# Altium PCB pcb.pcbdoc (part 1 of 3)
Units mm, origin at the board's own origin, x right, y up, seen from the top; angles counter-clockwise.
Board outline 95 x 60 mm, 4 copper layers (Top Layer, TopInt Layer, BotInt Layer, Bottom Layer), stack 1.456 mm thick; 192 components, 186 nets, 777 pads, 311 vias.
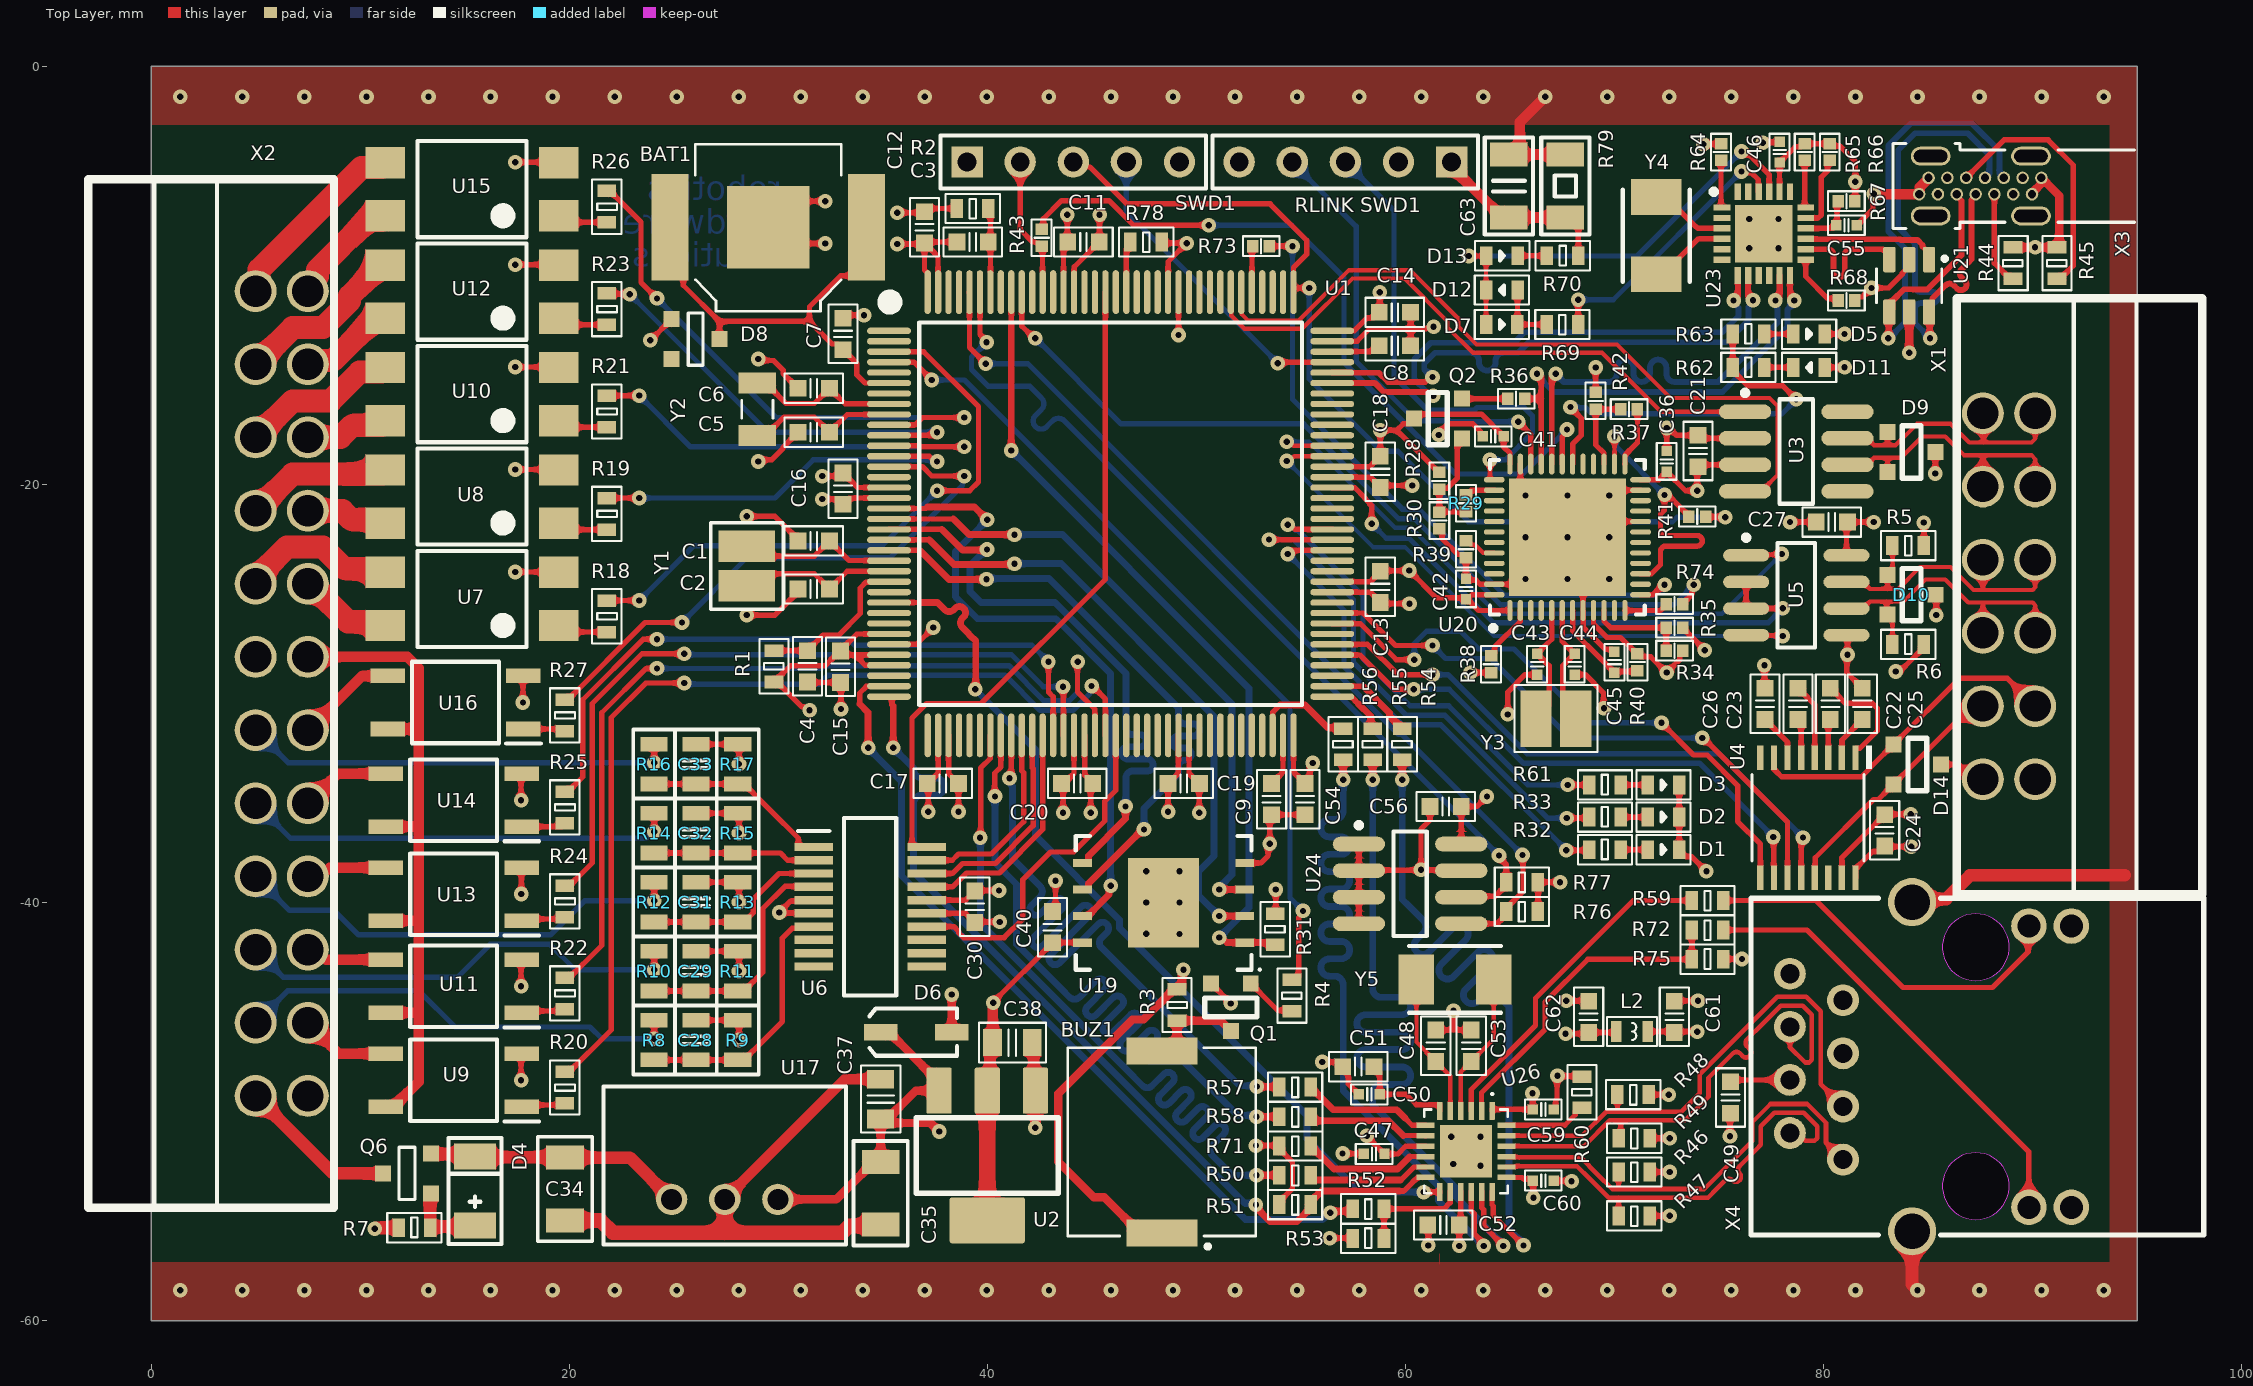
[diagram p0: Top Layer view]
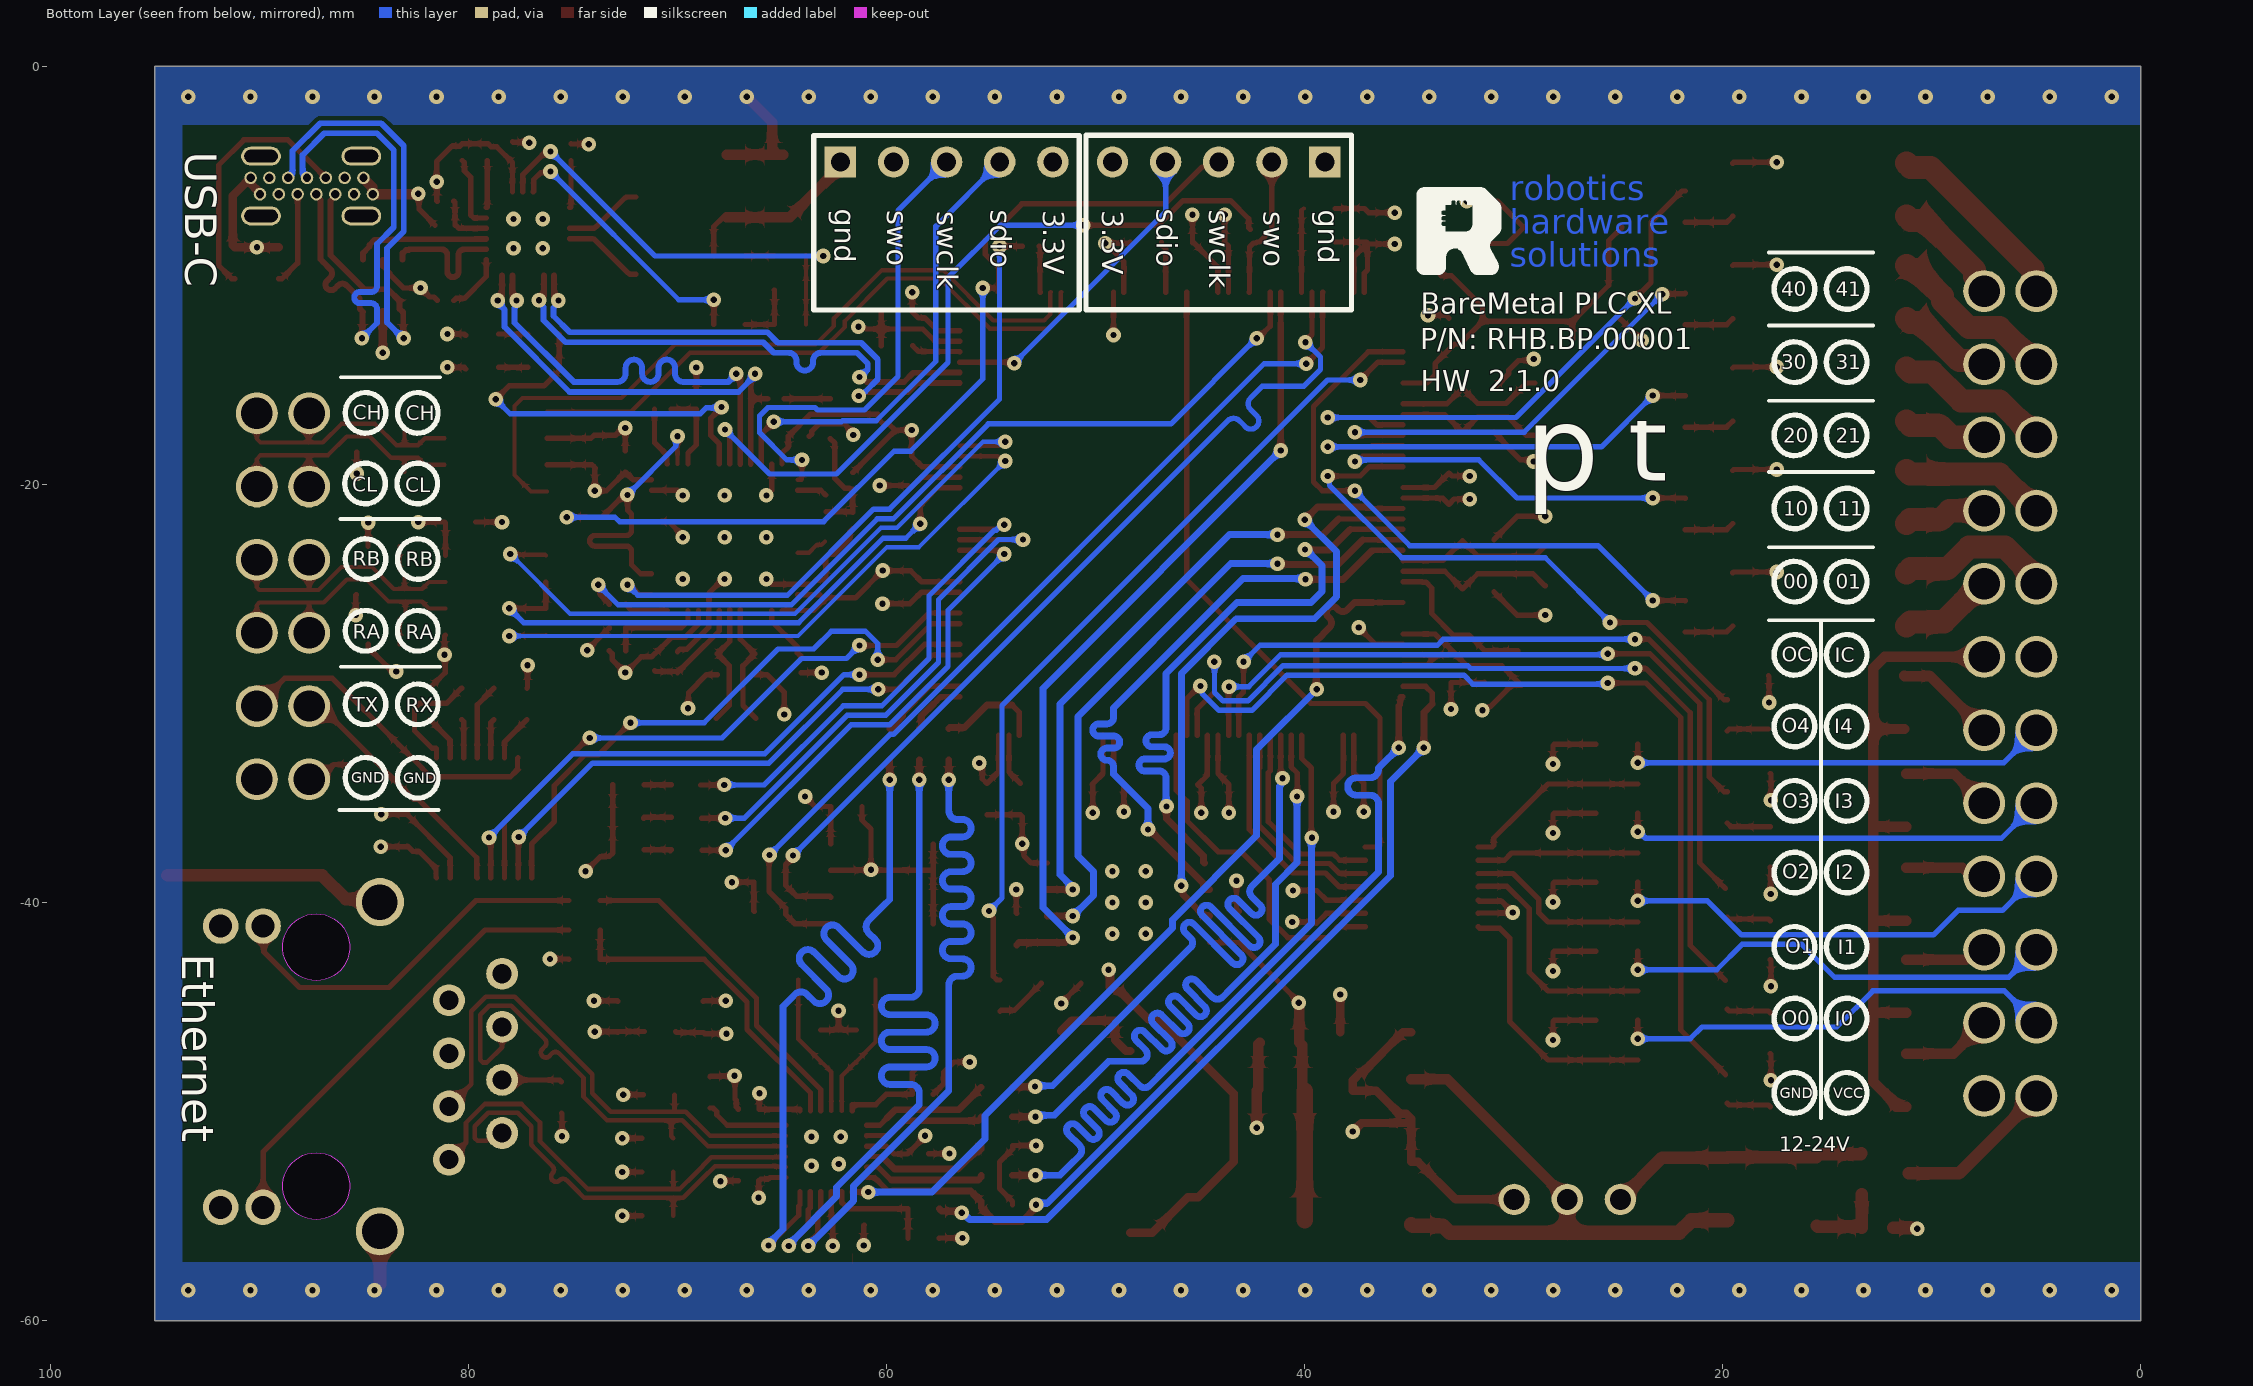
[diagram p1: Bottom Layer view, seen from below]
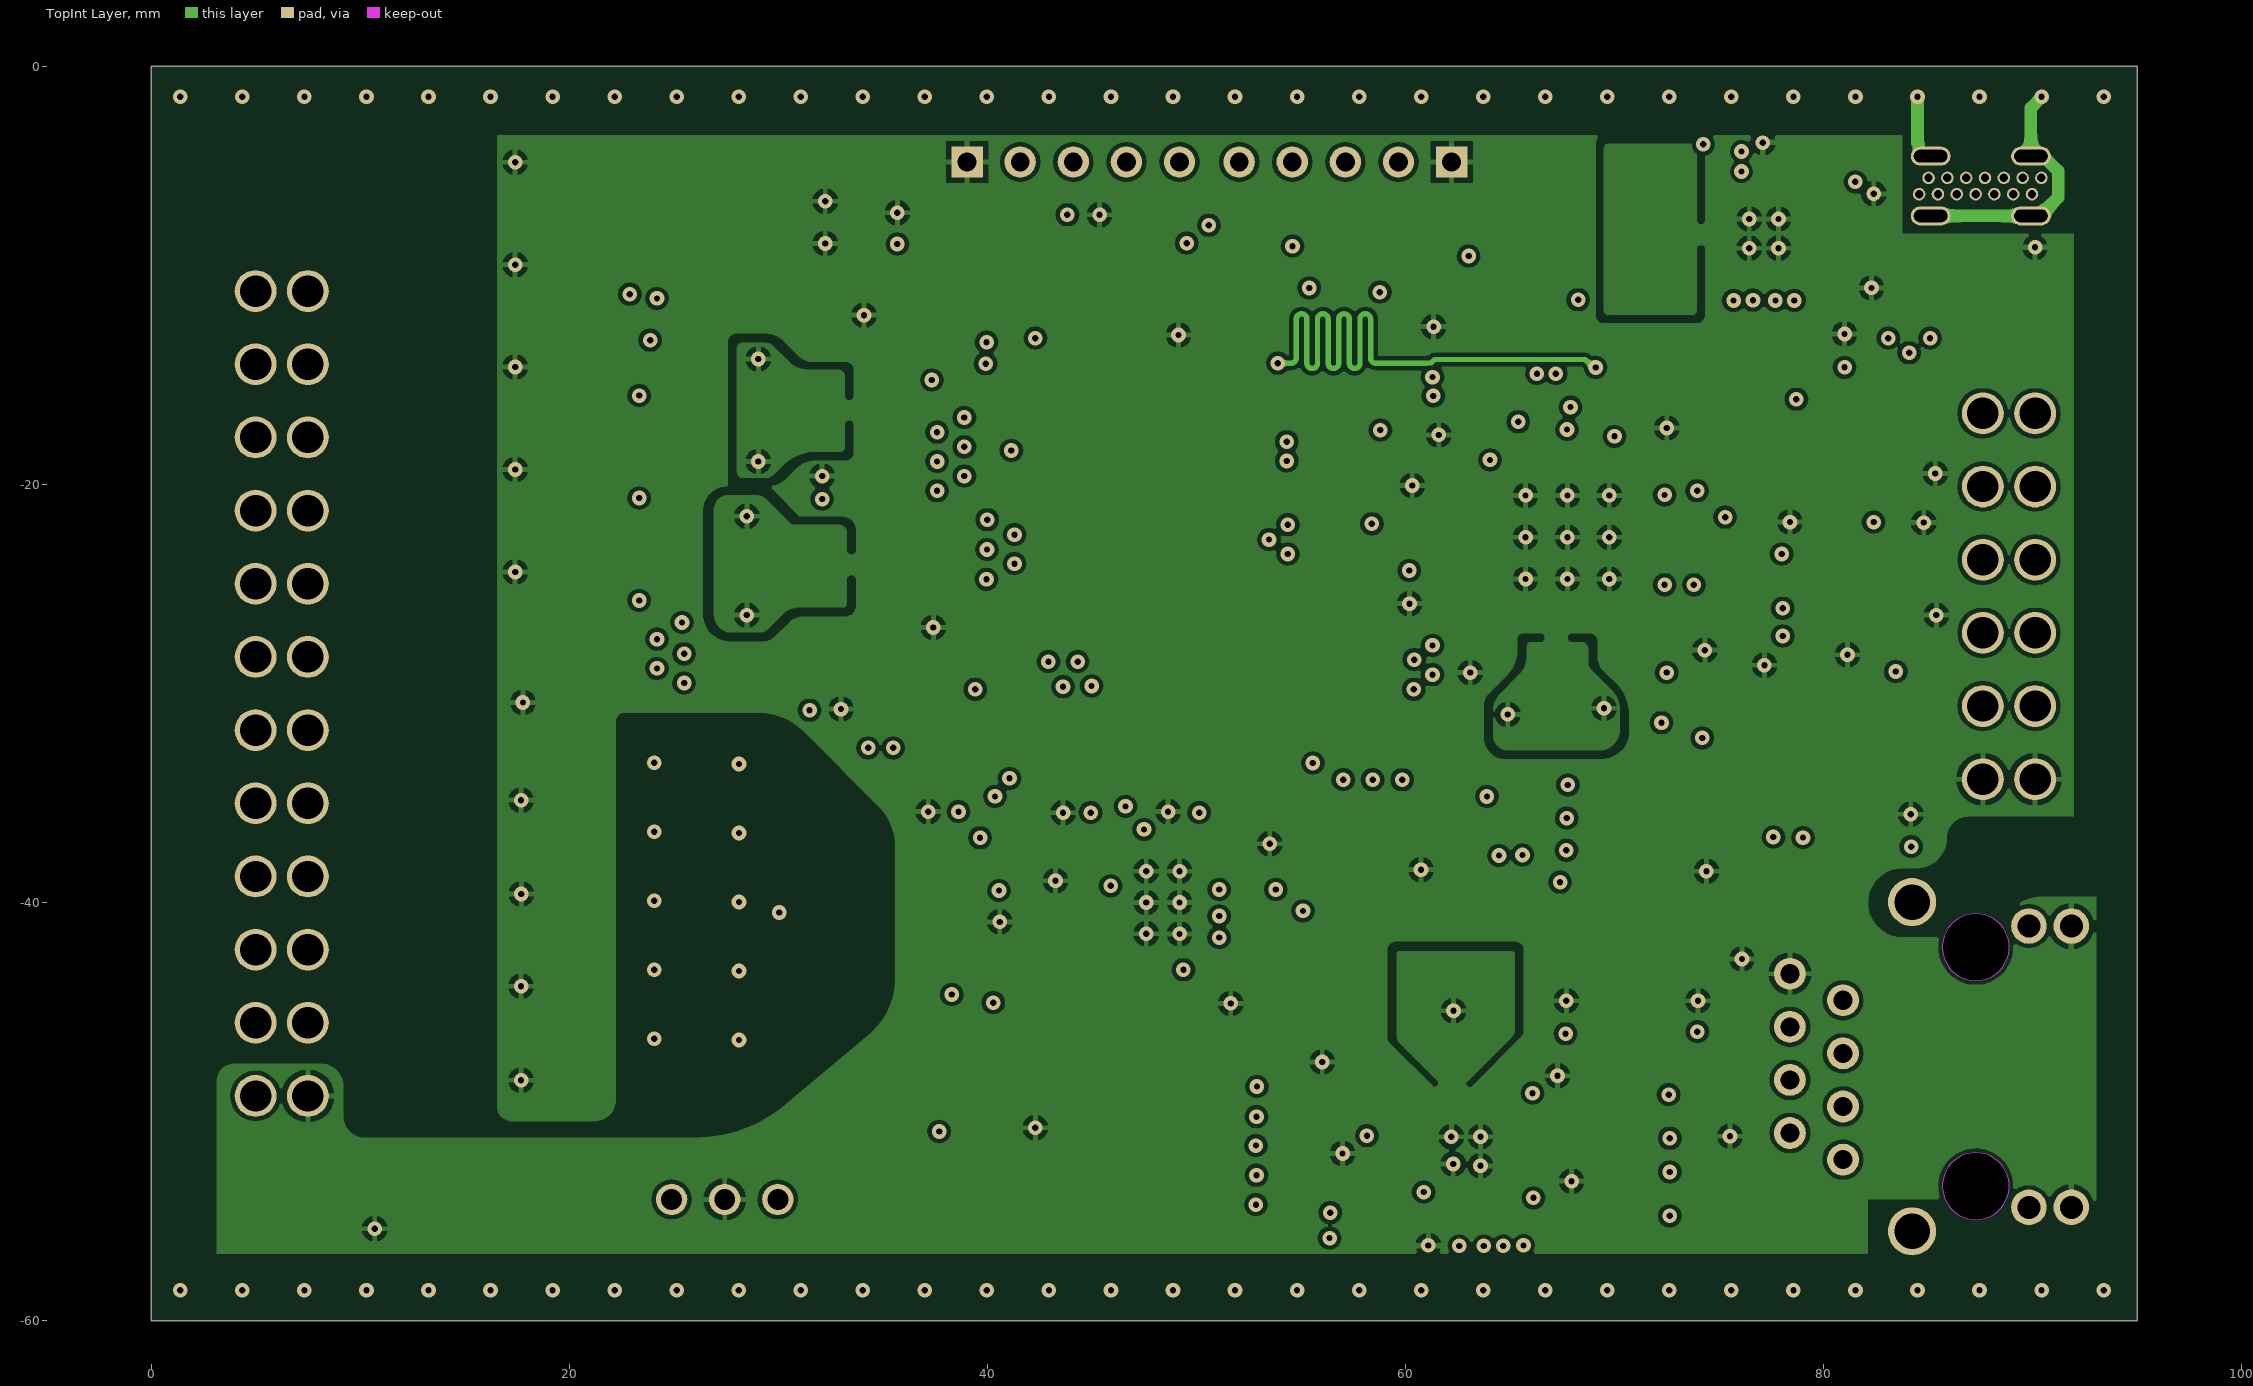
[diagram p2: TopInt Layer]
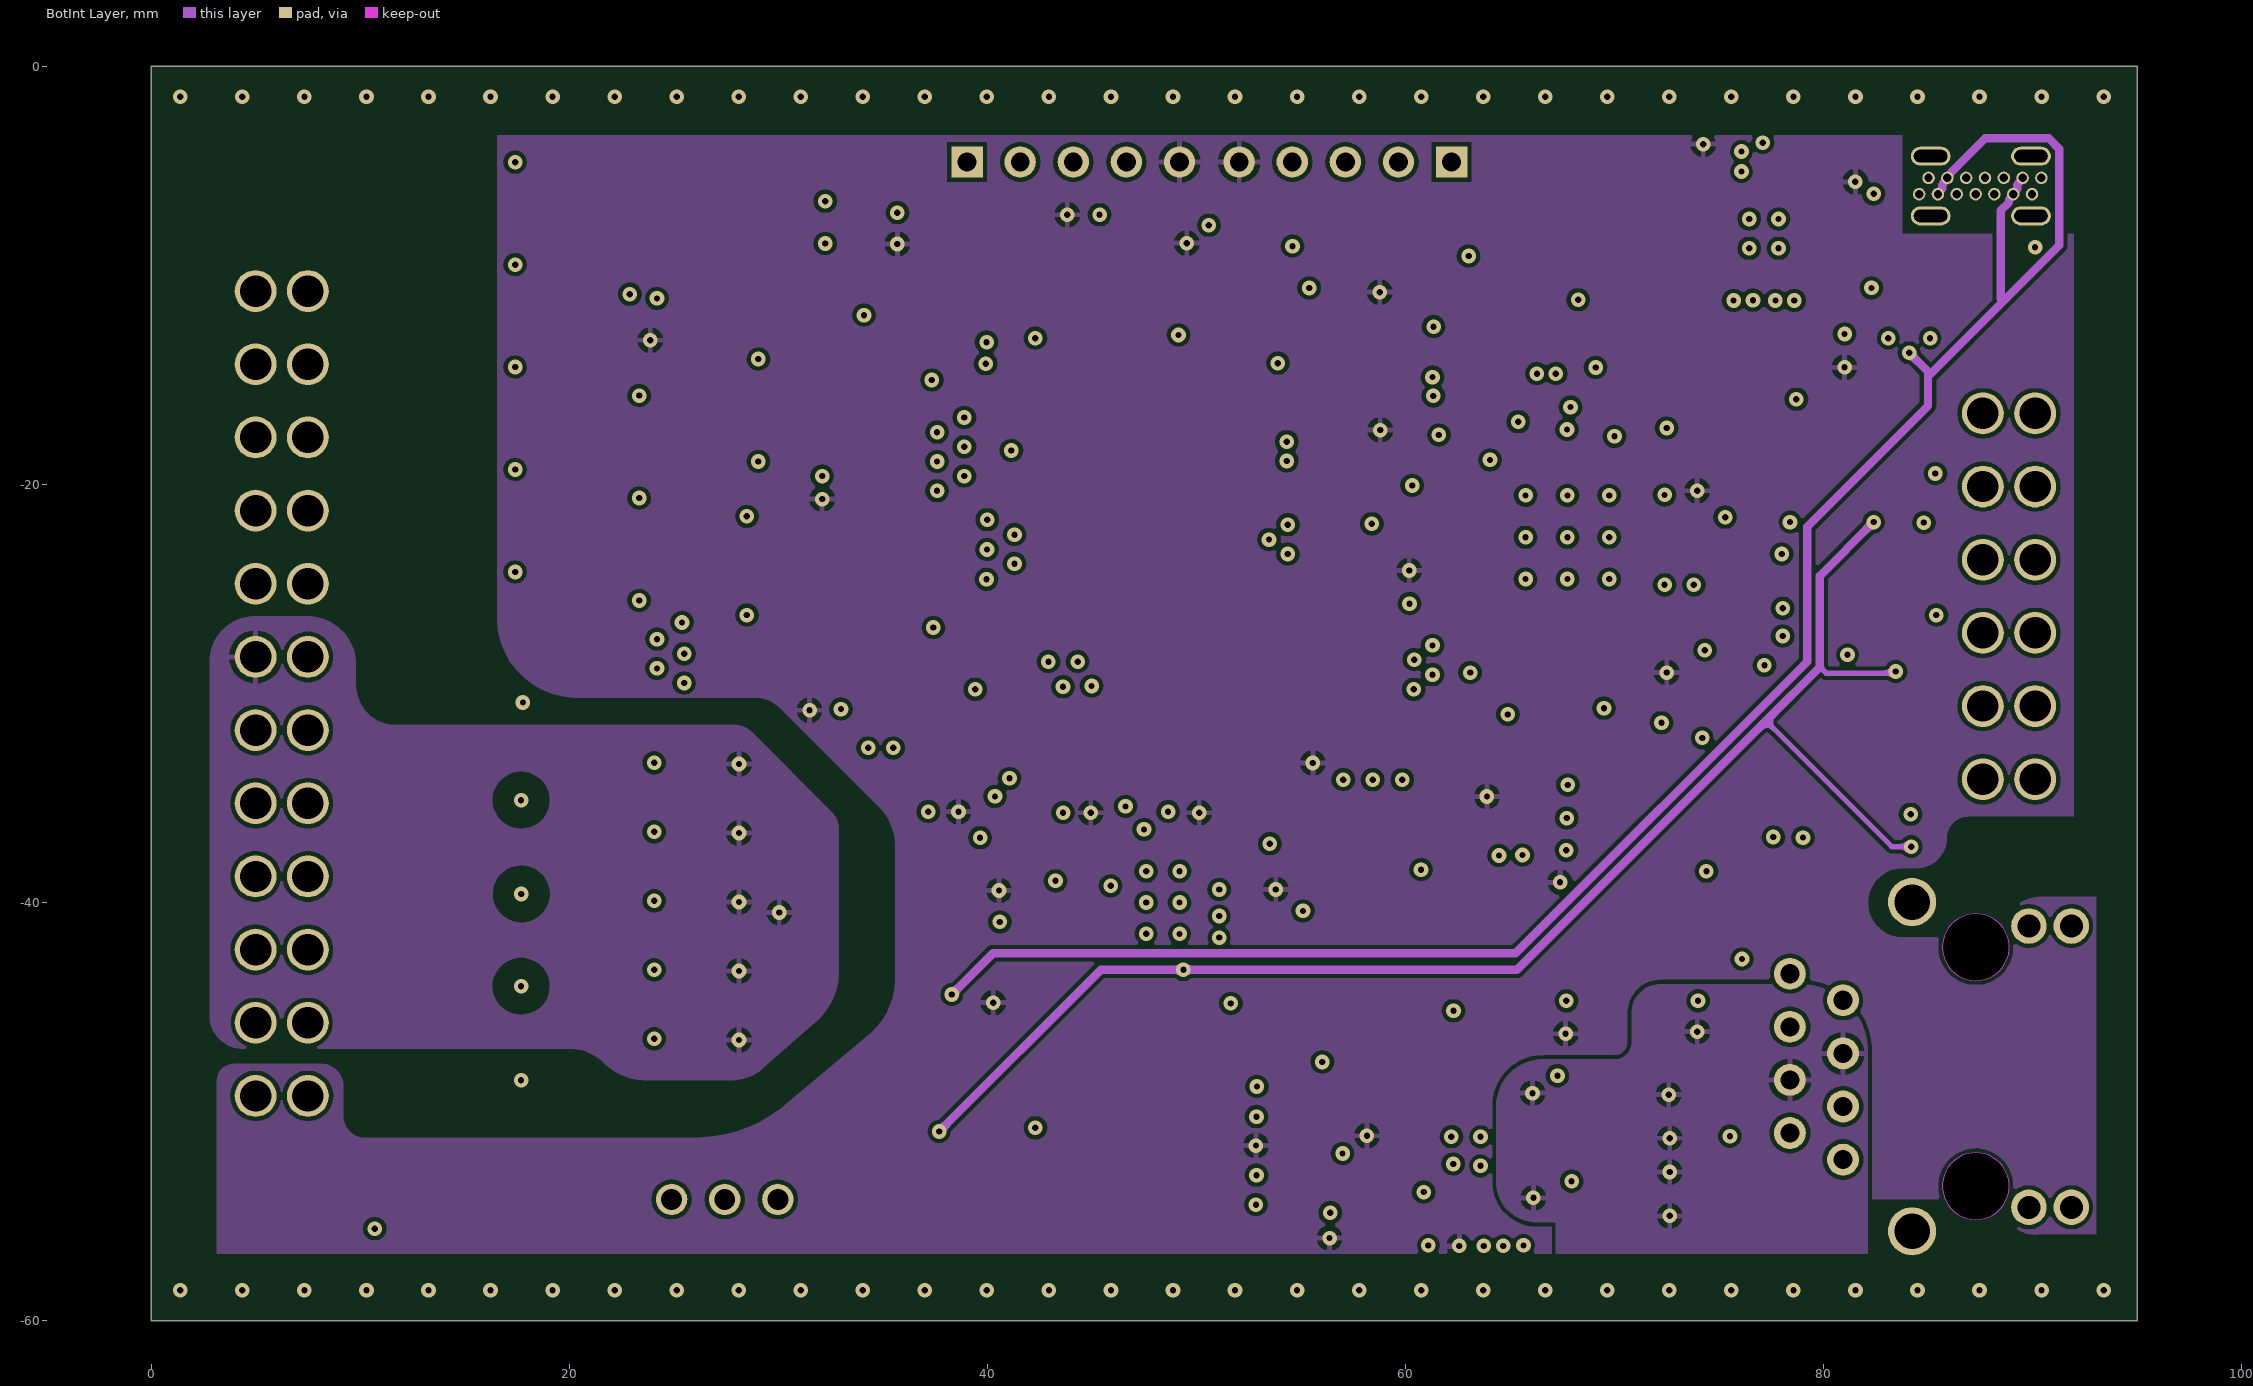
[diagram p3: BotInt Layer]

## Layer stack, top to bottom
Top Solder: solder mask 0.0102, Solder Resist, Dk 3.5
Top Layer: signal copper 0.035
Dielectric 4: prepreg 0.193, FR-4 (TG150), Dk 4.6
TopInt Layer: signal copper 0.035
Dielectric 3: core 0.93, FR-4 (TG150), Dk 4.6
BotInt Layer: signal copper 0.035
Dielectric 5: prepreg 0.193, FR-4 (TG150), Dk 4.6
Bottom Layer: signal copper 0.035
Bottom Solder: solder mask 0.0102, Solder Resist, Dk 3.5

## Board outline
0,-60 95,-60 95,0 0,0

## Design rules (kind name [scope] priority, off if disabled: settings)
Clearance [All] p1: gap=0.2 ignorepadtopadclearanceinfootprint=TRUE
DiffPairsRouting DiffPairsRoutingRS485 [InDifferentialPair('RS485')] p1: maxlimit=0.548 minlimit=0.254 mostfreqgap=0.548 toplayer_mingap=0.4 toplayer_maxgap=0.4 toplayer_prefgap=0.4 toplayer_minwidth=0.2 toplayer_maxwidth=0.2 toplayer_prefwidth=0.2 bottomlayer_mingap=0.4 bottomlayer_maxgap=0.4 bottomlayer_prefgap=0.4 bottomlayer_minwidth=0.2 bottomlayer_maxwidth=0.2 bottomlayer_prefwidth=0.2 impedanceprofiledriven=TRUE impedanceprofileid={0CD26A87-7467-4AA8-B589-CDAB2CE7D8B1} impedanceprofilevalue=120.000000 maxuncoupledlength=12.7
DiffPairsRouting DiffPairsRoutingCAN [InDifferentialPair('CAN')] p2: maxlimit=0.548 minlimit=0.127 mostfreqgap=0.548 toplayer_mingap=0.4 toplayer_maxgap=0.4 toplayer_prefgap=0.4 toplayer_minwidth=0.2 toplayer_maxwidth=0.2 toplayer_prefwidth=0.2 bottomlayer_mingap=0.4 bottomlayer_maxgap=0.4 bottomlayer_prefgap=0.4 bottomlayer_minwidth=0.2 bottomlayer_maxwidth=0.2 bottomlayer_prefwidth=0.2 impedanceprofiledriven=TRUE impedanceprofileid={A91272E8-C8F6-4C4C-99E7-20C5360C3B78} impedanceprofilevalue=120.000000 maxuncoupledlength=12.7
DiffPairsRouting DiffPairsRoutingRJ45 [InDifferentialPairClass('RJ45')] p3: maxlimit=0.254 minlimit=0.2 mostfreqgap=0.254 toplayer_maxgap=0.2 toplayer_prefgap=0.2 toplayer_minwidth=0.22 toplayer_maxwidth=0.22 toplayer_prefwidth=0.22 bottomlayer_maxgap=0.2 bottomlayer_prefgap=0.2 bottomlayer_minwidth=0.22 bottomlayer_maxwidth=0.22 bottomlayer_prefwidth=0.22 impedanceprofiledriven=TRUE impedanceprofileid={986FC914-A1FE-4ACC-8DF7-E6FD76750B9A} impedanceprofilevalue=100.000000 maxuncoupledlength=12.7
DiffPairsRouting DiffPairsRoutingUSB [InDifferentialPairClass('USB')] p4: maxlimit=0.254 minlimit=0.2 mostfreqgap=0.254 toplayer_maxgap=0.2 toplayer_prefgap=0.2 toplayer_minwidth=0.279 toplayer_maxwidth=0.279 toplayer_prefwidth=0.279 bottomlayer_maxgap=0.2 bottomlayer_prefgap=0.2 bottomlayer_minwidth=0.279 bottomlayer_maxwidth=0.279 bottomlayer_prefwidth=0.279 impedanceprofiledriven=TRUE impedanceprofileid={2354B49F-0040-4CFA-8CDB-5E1B61B2854D} impedanceprofilevalue=90.000000 maxuncoupledlength=12.7
HoleSize [All] p1: absolutevalues=TRUE maxlimit=4 minlimit=0.2 maxpercent=80.000 minpercent=20.000
MatchedLengths MatchedLengths_I2C_EEPROM [InNetClass('I2C_EEPROM')] p1: tolerance=0.2 checknetsindiffpair=FALSE checkdiffpairvsdiffpair=TRUE checkxsignals=TRUE checkothers=TRUE
MatchedLengths MatchedLengths_QSPI [InxSignalClass('QSPI')] p2: tolerance=0.2 checknetsindiffpair=FALSE checkdiffpairvsdiffpair=TRUE checkxsignals=TRUE checkothers=TRUE
MatchedLengths MatchedLengths_ETH_RJ45 [InDifferentialPairClass('RJ45')] p3: tolerance=0.2 checknetsindiffpair=TRUE checkdiffpairvsdiffpair=FALSE checkxsignals=FALSE checkothers=FALSE
MatchedLengths MatchedLengths_ETH [InxSignalClass('RMII')] p4: tolerance=0.2 checknetsindiffpair=FALSE checkdiffpairvsdiffpair=TRUE checkxsignals=TRUE checkothers=TRUE
MatchedLengths MatchedLengths_SWD [InxSignalClass('SWD')] p5: tolerance=0.2 checknetsindiffpair=FALSE checkdiffpairvsdiffpair=TRUE checkxsignals=TRUE checkothers=TRUE
MatchedLengths MatchedLengths_USB [InDifferentialPairClass('USB')] p6: tolerance=0.2 checknetsindiffpair=TRUE checkdiffpairvsdiffpair=FALSE checkxsignals=FALSE checkothers=FALSE
MatchedLengths MatchedLengths_RS485 [InNetClass('RS485')] p7: tolerance=0.25 checknetsindiffpair=FALSE checkdiffpairvsdiffpair=TRUE checkxsignals=TRUE checkothers=TRUE
MatchedLengths MatchedLengths_СAN [InNetClass('CAN')] p8: tolerance=0.25 checknetsindiffpair=TRUE checkdiffpairvsdiffpair=FALSE checkxsignals=FALSE checkothers=FALSE
MinimumSolderMaskSliver [All] p1: minsoldermaskwidth=0.1
NetAntennae [Not InNet('SHIELD') And IsNet] p1: netantennaetolerance=0
ParallelSegment ParallelSegment_SWD [InXSignalClass('SWD')] p1: limit=25.4 gap=0.508
ParallelSegment ParallelSegment_RMII [InXSignalClass('RMII')] p2: limit=25.4 gap=0.508
ParallelSegment ParallelSegment_QSPI [InXSignalClass('QSPI') vs InXSignalClass('QSPI')] p3: limit=25.4 gap=0.508
PolygonConnect PolygonConnect_1 [InNet('SHIELD')] p1: connectstyle=Direct reliefconductorwidth=0.254 reliefentries=4 polygonreliefangle="90 Angle" airgapwidth=0.254
PolygonConnect [All] p2: connectstyle=Relief reliefconductorwidth=0.254 reliefentries=4 polygonreliefangle="90 Angle" airgapwidth=0.254
RoutingVias [All] p1: holewidth=0.3 width=0.7 viastyle="Through Hole" minholewidth=0.3 minwidth=0.7 maxholewidth=0.3 maxwidth=0.7
SilkToSilkClearance [All] p1: silktosilkclearance=0
SilkToSolderMaskClearance [IsPad] p1: minsilkscreentomaskgap=0.01 clearancetoexposedcopper=TRUE
SolderMaskExpansion SolderMaskExpansion_Via [IsVia] p1: expansion=0.05 istentingtop=TRUE useseparateexpansions=TRUE expansionbottom=0.05 istentingbottom=TRUE
SolderMaskExpansion [All] p2: expansion=0.05 istentingtop=FALSE useseparateexpansions=TRUE expansionbottom=0.05 istentingbottom=FALSE
UnRoutedNet UnRoutedNet_RegionLogo [OnLayer('Bottom Layer') && IsRegion] p1 off:
UnRoutedNet [All] p2: checkbadconnections=TRUE
Width Width_UART [InNetClass('UART')] p1: maxlimit=0.325 minlimit=0.254 preferedwidth=0.325 impedanceprofiledriven=TRUE impedanceprofileid={2350BD46-1102-4CA0-B769-CF567CDB831D} impedanceprofilevalue=50.000000 minimp=50.000000 maximp=50.000000 favimp=50.000000
Width Width_SWD [InNetClass('SWD')] p2: maxlimit=0.325 minlimit=0.254 preferedwidth=0.325 impedanceprofiledriven=TRUE impedanceprofileid={11ABE65C-2ECF-4417-B09D-992BCD4A5570} impedanceprofilevalue=50.000000 minimp=50.000000 maximp=50.000000 favimp=50.000000
Width Width_QSPI [InNetClass('QSPI')] p3: maxlimit=0.325 minlimit=0.254 preferedwidth=0.325 impedanceprofiledriven=TRUE impedanceprofileid={12ACEEA3-3501-4A91-BA66-AB418826FC36} impedanceprofilevalue=50.000000 minimp=50.000000 maximp=50.000000 favimp=50.000000
Width Width_eth [InNetClass('ETH')] p4: maxlimit=0.325 minlimit=0.254 preferedwidth=0.325 impedanceprofiledriven=TRUE impedanceprofileid={FBDE6998-475E-412D-8F43-3A9D25EF8CF1} impedanceprofilevalue=50.000000 minimp=50.000000 maximp=50.000000 favimp=50.000000 checkconnectedcopper=TRUE
Width [All] p5: maxlimit=25 minlimit=0.2 preferedwidth=0.254 midlayer1_maxwidth=5 midlayer2_maxwidth=5 minimp=50.000000 maximp=50.000000 favimp=50.000000
23 further rules are at their usual default settings.

## Classes and differential pairs
net class UART: NetR73_1 NetR74_2
net class SWD: SWCLK1 SWDIO1 SWO1
net class I2C_EEPROM: NetR76_1 NetR77_1
differential pair class RS485: RS485
net class RS485: RS485_N RS485_P
differential pair class USB: USB_CONN_D USB_HUB USB_MCU USB_RLINK
net class CAN: CAN_N CAN_P
net class USB_RLINK: USB_RLINK_N USB_RLINK_P
net class USB_MCU: USB_MCU_N USB_MCU_P
net class USB_HUB: USB_HUB_N USB_HUB_P
net class USB_C: USB_CONN_D_N USB_CONN_D_P
component class eeprom: C56 R76 R77
differential pair class RJ45: RD TD
net class ETH_RJ45: RD_N RD_P TD_N TD_P
net class ETH: ENET_CRS ENET_MDC ENET_MDIO ENET_REF_CLK ENET_RXD0 ENET_RXD1 ENET_TX_EN ENET_TXD0 ENET_TXD1
component class eth: C47 C48 C49 C50 C51 C52 C53 C59 C60 C61 C62 L2 R46 R47 R48 R49 R50 R51 R52 R53 R54 R55 R56 R57 R58 R59 R60 R71 R72 R75 U26 X4 Y5
component class usb: "    " C46 C55 C63 D7 D12 D13 R44 R45 R64 R65 R66 R67 R68 R69 R70 R79 U21 U23 X3
component class dcdc: C34 C35 C37 C38 D6 U2 U17
component class MCU: BAT1 BUZ1 C1 C2 C3 C4 C5 C6 C7 C8 C9 C11 C12 C13 C14 C15 C16 C17 C18 C19 C20 C54 D1 D2 D3 D8 Q1 R1 R2 R3 R4 R32 R33 R61 R78 U1 Y1 Y2
component class interfaces: C21 C22 C23 C24 C25 C26 C27 D9 D10 D14 R5 R6 U3 U4 U5 X1
component class connections: C28 C29 C30 C31 C32 C33 D4 Q6 R7 R8 R9 R10 R11 R12 R13 R14 R15 R16 R17 R18 R19 R20 R21 R22 R23 R24 R25 R26 R27 U6 U7 U8 U9 U10 U11 U12 U13 U14 U15 U16 X2
component class qspi_flash: C40 R31 U19
component class rlink_eth: C36 C41 C42 C43 C44 C45 D5 D11 Q2 R28 R29 R30 R34 R35 R36 R37 R38 R39 R40 R41 R42 R43 R62 R63 R73 R74 "RLINK SWD1" SWD1 U20 Y3
net class QSPI: QUADSPI_CLK QUADSPI_NCS QUADSPI_OI0 QUADSPI_OI1 QUADSPI_OI2 QUADSPI_OI3
differential pair CAN: +CAN_P -CAN_N
differential pair USB_HUB: +USB_HUB_P -USB_HUB_N
differential pair USB_RLINK: +USB_RLINK_P -USB_RLINK_N
differential pair USB_MCU: +USB_MCU_P -USB_MCU_N
differential pair TD: +TD_P -TD_N
differential pair RD: +RD_P -RD_N
differential pair USB_CONN_D: +USB_CONN_D_P -USB_CONN_D_N
differential pair RS485: +RS485_P -RS485_N

## Components (designator, comment, footprint, x,y, rotation, side; value= is the part's Value field where it differs from the comment)
BAT1 "2998TR" BAT_2998TR 29.525,-7.7 r180 top locked
BUZ1 "L-KLS3-SMT-09X1.8'" SPKR_PKMCS0909E4000-R1 48.35,-51.45 r90 top locked
C1 "8pF 50V" C_0603 31.7,-22.7 r0 top
C2 "8pF 50V" C_0603 31.7,-25 r0 top
C3 "0.1uF 50V" C_0603 39.3,-8.4 r0 top
C4 "0.1uF 50V" C_0603 31.4,-28.7 r90 top
C5 "8pF 50V" C_0603 31.7,-17.5 r0 top
C6 "8pF 50V" C_0603 31.7,-15.4 r0 top
C7 "0.1uF 50V" C_0603 33.1,-12.8 r270 top
C8 "2.2uF 16V" C_0603 59.5,-13.368 r180 top
C9 "2.2uF 16V" C_0603 53.6,-35.052 r90 top
C11 "0.1uF 50V" C_0603 44.6,-8.4 r180 top
C12 "0.1uF 50V" C_0603 37,-7.7 r270 top
C13 "0.1uF 50V" C_0603 58.8,-24.9 r90 top
C14 "0.1uF 50V" C_0603 59.5,-11.768 r180 top
C15 "0.1uF 50V" C_0603 32.98,-28.72 r90 top
C16 "0.1uF 50V" C_0603 33.1,-20.2 r270 top
C17 "0.1uF 50V" C_0603 37.873,-34.3 r0 top
C18 "0.1uF 50V" C_0603 58.8,-19.4 r90 top
C19 "0.1uF 50V" C_0603 49.4,-34.3 r0 top
C20 "0.1uF 50V" C_0603 44.3,-34.3 r0 top
C21 "0.1uF 50V" C_0603 74,-18.4 r270 top
C22 "0.1uF 50V" C_0603 80.33,-30.494 r270 top
C23 "0.1uF 50V" C_0603 78.78,-30.494 r270 top
C24 "0.1uF 50V" C_0603 82.925,-36.548 r270 top
C25 "0.1uF 50V" C_0603 81.855,-30.494 r270 top
C26 "0.1uF 50V" C_0603 77.205,-30.494 r270 top
C27 "0.1uF 50V" C_0603 80.4,-21.8 r0 top locked
C28 "2.2nF 50V" C_0805#1 26.065,-46.578 r270 top
C29 "2.2nF 50V" C_0805#1 26.065,-43.278 r270 top
C30 "0.1uF 50V" C_0603 39.4,-40.2 r90 top
C31 "2.2nF 50V" C_0805#1 26.065,-39.978 r270 top
C32 "2.2nF 50V" C_0805#1 26.065,-36.678 r270 top
C33 "2.2nF 50V" C_0805#1 26.065,-33.378 r270 top
C34 "10uF 50V" C_1206 19.8,-53.7 r270 top
C35 "22uF 25V" C_1206 34.9,-53.9 r90 top
C36 "100nF 16V" C_0402 72.5,-18.9 r270 top
C37 "10uF 10V" C_0805#2 34.9,-49.4 r270 top
C38 "10uF 10V" C_0805#2 41.2,-46.7 r180 top
C40 "0.1uF 50V" C_0603 43.117,-41.177 r270 top
C41 "100nF 16V" C_0402 64.2,-17.7 r0 top
C42 "100nF 16V" C_0402 62.9,-25 r270 top
C43 "8pF 50V" C_0402 66.3,-28.6 r90 top
C44 "8pF 50V" C_0402 68.1,-28.6 r90 top
C45 "100nF 16V" C_0402 70,-28.5 r270 top
C46 "100nF 16V" C_0402 77.9,-4.1 r270 top
C47 "0.01uF 50V" C_0402 58.5,-52.025 r180 top
C48 "30pF 50V" C_0603 61.45,-46.85 r90 top
C49 "0.022uF" C_0603 75.55,-49.325 r90 top
C50 "470pF 50V" C_0402 58.275,-49.175 r180 top
C51 "1uF 50V" C_0603 57.75,-47.85 r0 top
C52 "1uF 50V" C_0603 61.82,-55.425 r0 top
C53 "30pF 50V" C_0603 63.15,-46.85 r90 top
C54 "0.1uF 50V" C_0603 55.2,-35.052 r90 top
C55 "100nF 16V" C_0402 81.1,-7.6 r0 top
C56 "0.1uF 50V" C_0603 61.925,-35.406 r0 top
C59 "0.01uF 50V" C_0402 66.6,-49.9 r0 top
C60 "0.01uF 50V" C_0402 66.6,-53.3 r0 top
C61 "1uF 50V" C_0603 72.867,-45.465 r270 top
C62 "1uF 50V" C_0603 68.767,-45.465 r270 top
C63 "1nF 1000V" C_1206 64.95,-5.725 r90 top
D1 "Green" LED_0603 72.348,-37.47 r0 top
D2 "Yellow" LED_0603 72.348,-35.913 r0 top
D3 "Red" LED_0603 72.348,-34.37 r0 top
D4 "BZV55C10" SOD80C 15.5,-53.8 r270 top
D5 "Red" LED_0603 79.31,-12.8 r0 top
D6 "SM5819PL-TP" SOD-123 36.6,-46.2 r180 top
D7 "Green" LED_0603 64.61,-12.35 r0 top
D8 "BAT54" SOT23#1 24.9,-12.095 r180 top
D9 "ESDCAN24-2BLY" SOT23#2 83.064,-17.498 r0 top
D10 "SM712-02HTG" SOT23#2 83.064,-24.322 r0 top
D11 "Green" LED_0603 79.31,-14.4 r180 top
D12 "Yellow" LED_0603 64.62,-10.7 r180 top
D13 "Red" LED_0603 64.623,-9.063 r0 top
D14 "ESD25L" SOT23#2 83.339,-32.447 r0 top
L2 "1uH" L_0603 70.842,-46.165 r0 top
Q1 "BC847B" SOT23#2 52.603,-43.864 r270 top
Q2 "MMBT9013" SOT23#2 62.7,-17.8 r180 top
Q6 "SI2309A" SOT23#1 13.384,-53.907 r0 top
R1 "10k" R_0603 29.8,-28.7 r270 top
R2 "10K" R_0603 39.3,-6.8 r0 top value=10k
R3 "1K" R_0603 49.075,-44.9 r90 top value=1k
R4 "3.3K" R_0603 54.575,-44.45 r270 top value=3.3k
R5 "10k" R_0603 84.05,-22.925 r0 top
R6 "10k" R_0603 84.05,-27.65 r180 top
R7 "100K" R_0603 12.598,-55.555 r180 top value=100k
R8 "6.2k" R_0805 24.065,-46.578 r270 top
R9 "2.4k" R_0805 28.065,-46.578 r270 top
R10 "6.2k" R_0805 24.065,-43.278 r270 top
R11 "2.4k" R_0805 28.065,-43.278 r270 top
R12 "6.2k" R_0805 24.065,-39.978 r270 top
R13 "2.4k" R_0805 28.065,-39.978 r270 top
R14 "6.2k" R_0805 24.065,-36.678 r270 top
R15 "2.4k" R_0805 28.065,-36.678 r270 top
R16 "6.2k" R_0805 24.065,-33.378 r270 top
R17 "2.4k" R_0805 28.065,-33.378 r270 top
R18 "300" R_0603 21.8,-26.31 r90 top
R19 "300" R_0603 21.8,-21.41 r90 top
R20 "300" R_0603 19.787,-48.848 r90 top
R21 "300" R_0603 21.8,-16.51 r90 top
R22 "300" R_0603 19.787,-44.348 r90 top
R23 "300" R_0603 21.8,-11.61 r90 top
R24 "300" R_0603 19.787,-39.948 r90 top
R25 "300" R_0603 19.787,-35.448 r90 top
R26 "300" R_0603 21.8,-6.71 r90 top
R27 "300" R_0603 19.787,-31.048 r90 top
R28 "10K" R_0402 61.625,-19.825 r90 top
R29 "100" R_0402 62.9,-20.9 r270 top
R30 "36K" R_0402 61.625,-21.725 r270 top
R31 "10K" R_0603 53.774,-41.277 r270 top value=10k
R32 "300" R_0603 69.548,-37.47 r180 top
R33 "300" R_0603 69.548,-35.913 r180 top
R34 "4.7K" R_0402 72.875,-27.95 r0 top
R35 "4.7K" R_0402 72.875,-26.85 r0 top
R36 "1.5K" R_0402 65.3,-15.9 r180 top
R37 "100" R_0402 70.7,-16.4 r180 top
R38 "4.7K" R_0402 64.1,-28.6 r270 top
R39 "100K" R_0402 62.9,-23.1 r90 top
R40 "100K" R_0402 71.1,-28.5 r90 top
R41 "22" R_0402 73.964,-21.536 r0 top
R42 "22" R_0402 69.1,-16 r90 top
R43 "22" R_0402 42.6,-8.2 r270 top
R44 "5.1k" R_0603 89.071,-9.409 r270 top
R45 "5.1k" R_0603 91.171,-9.409 r270 top
R46 "49.9" R_0603 70.948,-52.887 r0 top
R47 "49.9" R_0603 70.948,-54.987 r0 top
R48 "49.9" R_0603 70.895,-49.187 r0 top
R49 "49.9" R_0603 70.948,-51.275 r0 top
R50 "10" R_0603 54.727,-53.042 r0 top
R51 "4.7k" R_0603 54.725,-54.45 r0 top
R52 "33" R_0603 58.227,-54.65 r0 top
R53 "10k" R_0603 58.227,-56.063 r180 top
R54 "27" R_0603 59.847,-32.427 r270 top
R55 "27" R_0603 58.435,-32.427 r270 top
R56 "27" R_0603 57.025,-32.425 r270 top
R57 "10" R_0603 54.723,-48.83 r0 top
R58 "10" R_0603 54.727,-50.242 r0 top
R59 "330" R_0603 74.452,-39.9 r0 top
R60 "12.1k" R_0603 68.447,-49.075 r270 top
R61 "300" R_0603 69.548,-34.37 r180 top
R62 "300" R_0603 76.41,-14.4 r180 top
R63 "300" R_0603 76.41,-12.8 r180 top
R64 "10K" R_0402 75.1,-4.1 r90 top
R65 "10K" R_0402 79.1,-4.1 r90 top
R66 "10K" R_0402 80.3,-4.1 r90 top
R67 "10K" R_0402 81.1,-6.45 r0 top
R68 "2.7K" R_0402 81.1,-11.2 r0 top
R69 "300" R_0603 67.51,-12.35 r0 top
R70 "300" R_0603 67.523,-9.063 r180 top
R71 "4.7k" R_0603 54.727,-51.642 r0 top
R72 "330" R_0603 74.452,-41.313 r0 top
R73 "22" R_0402 53.1,-8.6 r180 top
R74 "22" R_0402 72.875,-25.725 r0 top
R75 "10k" R_0603 74.452,-42.713 r180 top
R76 "4.7k" R_0603 65.575,-40.425 r0 top
R77 "4.7k" R_0603 65.575,-39.025 r0 top
R78 "10K" R_0603 47.6,-8.4 r0 top value=10k
R79 "1M" R_1206 67.65,-5.725 r90 top
"RLINK SWD1" "PLS2-5" PLS-5-3D 62.21,-4.575 r180 top locked net-tie
SWD1 "PLS2-5" PLS-5-3D 39.035,-4.575 r0 top locked net-tie
U1 "STM32F765ZGT7" TQFP144_M 45.9,-21.4 r0 top locked
U2 "LM1117GS-3.3" "SOT 223" 40,-52.1 r90 top
U3 "SN65HVD232D" SO-8_M 78.7,-18.425 r0 top
U4 "ST232CTR" TSSOP16_STM 79.255,-35.943 r270 top
U5 "SN75176BDR" SO-8 78.7,-25.3 r0 top
U6 "CA-IS3988P" SOP64P600X175-20N 34.4,-40.2 r0 top
U7 "GAQY252G3EH" SMD-4P 19.502,-26.747 r90 top
U8 "GAQY252G3EH" SMD-4P 19.502,-21.847 r90 top
U9 "GAQY221R2S" SOP254P700X270-4N 17.725,-49.77 r90 top
U10 "GAQY252G3EH" SMD-4P 19.502,-16.947 r90 top
U11 "GAQY221R2S" SOP254P700X270-4N 17.725,-45.27 r90 top
U12 "GAQY252G3EH" SMD-4P 19.502,-12.047 r90 top
U13 "GAQY221R2S" SOP254P700X270-4N 17.725,-40.87 r90 top
U14 "GAQY221R2S" SOP254P700X270-4N 17.725,-36.37 r90 top
U15 "GAQY252G3EH" SMD-4P 19.502,-7.147 r90 top
U16 "GAQY221R2S" SOP254P700X270-4N 17.812,-31.698 r90 top
U17 "K7805-500R3" K7805500R3 24.9,-54.2 r180 top
U19 "W25Q128JVEIQ" "W-PDFN-8 (MLP8) – 8mm ? 6mm  Se" 48.448,-39.96 r90 top
U20 "STM32F103CBU6" STM-UFQFPN48_M 67.75,-22.525 r90 top
U21 "USBLC6-2SC6" SOT95P280X145-6N 84.1,-10.5 r270 top
U23 "FE1.1S-BQFN24B" QFN50P400X400X80-25N-D 77.15,-8 r0 top
U24 "24c256" SO-8_M 60.225,-39.106 r0 top
U26 "LAN8720A-CP-TR" QFN50P400X400X100-25N 62.895,-51.9 r270 top
X1 "1787056" "DMC 1.5/ 6-G1F-3.5-LR P20THR 1787056" 86.475,-25.35 r270 top locked
X2 "1787111" "DMC 1,5/12-G1F-3,5-LRP20THRR72" 8.65,-40.5 r90 top locked
X3 "KUSBX-SL-CS1N14-B" MOLEX_2169890001 95.025,-5.725 r90 top locked
X4 "HR915340A'" RJ45-TH_HR915340A 80.935,-52.295 r270 top locked
Y1 "NX3225GD" NX3225GD#1 28.5,-23.9 r270 top
Y2 "NX3215SA-32.768K-STD-MUA-14" XTAL_NX3215SA-32.768K-STD-MUA-8 29,-16.4 r90 top
Y3 "NX3225GD" NX3225GD#2 67.2,-31.2 r90 top
Y4 "X503212MSB2GI" X5032 72,-8.1 r270 top
Y5 "X503225MSB2GI" X5032 62.375,-43.675 r0 top

## Footprints (in the part's own frame and the unit in brackets; to place one, negate y for a bottom-side part, rotate by r counter-clockwise, add the part's x,y. Pads: shape width x height; smd on the part's side, far side on the other; paste and mask are expansions set on the pad)
BAT_2998TR [mm]
  rect 3.96x3.96 smd paste-3: N(0,0)
  rect 1.78x5.08 smd: P1(-4.7,0) P1(4.7,0)
  silkscreen extent -3.49,-3.98 3.49,4.02, body extent -5.36,-3.94 5.36,4.06, height 3.05
C_0402 [mm]
  rect 0.5x0.5 smd: 1(-0.5,0) 2(0.5,0)
  silkscreen extent -0.87,-0.48 0.87,0.48, body extent -0.5,-0.25 0.5,0.25, height 0.5
C_0603 [mm] "Chip Capacitor; Body 1.6 x 0.8 mm (LxW typ)"
  rect 0.8x0.8 smd: 1(-0.75,0) 2(0.75,0)
  silkscreen extent -1.4,-0.7 1.4,0.7, body extent -0.8,-0.4 0.8,0.4, height 0.3
C_0805#1 [mm] "Capacitor Pattern"
  rect 0.7x1.3 smd: 1(-0.95,0) 2(0.95,0)
  silkscreen extent -1.65,-1 1.65,1, body extent -1,-0.63 1,0.62, height 0.6
C_0805#2 [mm] "Capacitor Pattern"
  rect 0.9x1.3 smd: 1(-0.95,0) 2(0.95,0)
  silkscreen extent -1.6,-0.95 1.6,0.95, body extent -1,-0.63 1,0.62, height 0.6
C_1206 [mm]
  rect 1.15x1.8 smd: 1(-1.5,0) 2(1.5,0)
  silkscreen extent -2.5,-1.3 2.5,1.3, body extent -1.6,-0.8 1.6,0.8, height 1
"DMC 1,5/12-G1F-3,5-LRP20THRR72" [mm] "Connector LR"
  round 2 hole 1.5: 1(-8.75,3.65) 2(-5.25,3.65) 3(-1.75,3.65) 4(1.75,3.65) 5(5.25,3.65) 6(8.75,3.65) 7(12.25,3.65) 8(15.75,3.65) 9(19.25,3.65) 10(22.75,3.65) 11(26.25,3.65) 12(29.75,3.65) 13(29.75,1.15) 14(26.25,1.15) 15(22.75,1.15) 16(19.25,1.15) 17(15.75,1.15) 18(12.25,1.15) 19(8.75,1.15) 20(5.25,1.15) 21(1.75,1.15) 22(-1.75,1.15) 23(-5.25,1.15) 24(-8.75,1.15)
  silkscreen extent -14.2,-0.1 35.1,11.65, body extent -14,0.05 35,11.65, height 10.9
"DMC 1.5/ 6-G1F-3.5-LR P20THR 1787056" [mm] "Connector LR"
  round 2 hole 1.5: 1(-8.75,3.65) 2(-5.25,3.65) 3(-1.75,3.65) 4(1.75,3.65) 5(5.25,3.65) 6(8.75,3.65) 7(8.75,1.15) 8(5.25,1.15) 9(1.75,1.15) 10(-1.75,1.15) 11(-5.25,1.15) 12(-8.75,1.15)
  silkscreen extent -14.25,-0.1 14.25,11.65, body extent -14,0.05 14,11.65, height 10.9
K7805500R3 [mm]
  round 1.5 hole 1: 1(0,0) 2(-2.54,0) 3(-5.08,0)
  silkscreen extent -8.34,-5.4 3.26,2.15, body extent -8.34,-5.4 3.26,2.15, height 10.51
L_0603 [mm] "Inductor Pattern"
  rect 0.5x1 smd: 1(0.75,0) 2(-0.75,0)
  silkscreen extent -1.2,-0.7 1.2,0.7, body extent -0.8,-0.39 0.8,0.41, height 0.45
LED_0603 [mm]
  rect 0.6x0.9 smd: 1(-0.75,0) 2(0.75,0)
  silkscreen extent -1.3,-0.7 1.3,0.7, body extent -0.8,-0.4 0.8,0.4, height 0.55
MOLEX_2169890001 [mm]
  round 0.6 hole 0.4 mask+0.064: A1(-0.39,5.05) A4(-0.39,5.95) A5(-0.39,6.85) A6(-0.39,7.75) A7(-0.39,8.65) A9(-0.39,9.55) A12(-0.39,10.45) B1(0.39,10) B4(0.39,9.1) B5(0.39,8.2) B6(0.39,7.3) B7(0.39,6.4) B9(0.39,5.5) B12(0.39,4.6)
  oval 0.9x1.9 hole 0.6 slot 1.6 at 90 deg mask+0.064: SH1(-1.43,5.1) SH2(1.43,5.1) SH3(-1.43,9.9) SH4(1.43,9.9)
  silkscreen extent -2.03,0.15 2.03,11.7, body extent -1.88,-3 1.88,11.65, height 9.04
NX3225GD#1 [mm]
  rect 1.5x2.7 smd: 1(0.95,0) 2(-0.95,0)
  silkscreen extent -2.07,-1.73 2.07,1.73, body extent -1.6,-1.25 1.6,1.25, height 1
NX3225GD#2 [mm]
  rect 2.7x1.5 smd: 1(0,-0.95) 2(0,0.95)
  silkscreen extent -1.6,-1.98 1.6,1.98, body extent -1.25,-1.6 1.25,1.6, height 1
PLS-5-3D [mm] "Connector; Header; 5 Position"
  rect 1.5x1.5 hole 0.9: 1(0,0)
  round 1.5 hole 0.9: 2(2.54,0) 3(5.08,0) 4(7.62,0) 5(10.16,0)
  silkscreen extent -1.27,-1.27 11.43,1.27, body extent -1.27,-1.27 11.43,1.27, height 8.44
QFN50P400X400X80-25N-D [mm]
  rect 0.8x0.3 smd: 1(-2,1.25) 2(-2,0.75) 3(-2,0.25) 4(-2,-0.25) 5(-2,-0.75) 6(-2,-1.25) 13(2,-1.25) 14(2,-0.75) 15(2,-0.25) 16(2,0.25) 17(2,0.75) 18(2,1.25)
  rect 0.3x0.8 smd: 7(-1.25,-2) 8(-0.75,-2) 9(-0.25,-2) 10(0.25,-2) 11(0.75,-2) 12(1.25,-2) 19(1.25,2) 20(0.75,2) 21(0.25,2) 22(-0.25,2) 23(-0.75,2) 24(-1.25,2)
  rect 2.75x2.75 smd: 25(0,0)
  silkscreen extent -2.52,1.88 -2.27,2.12, body extent -2.05,-2.05 2.05,2.05, height 0.8
QFN50P400X400X100-25N [mm]
  rrect7% 0.86x0.26 smd mask+0.15: 1(-1.935,1.25) 2(-1.935,0.75) 3(-1.935,0.25) 4(-1.935,-0.25) 5(-1.935,-0.75) 6(-1.935,-1.25) 13(1.935,-1.25) 14(1.935,-0.75) 15(1.935,-0.25) 16(1.935,0.25) 17(1.935,0.75) 18(1.935,1.25)
  rrect7% 0.26x0.86 smd mask+0.15: 7(-1.25,-1.935) 8(-0.75,-1.935) 9(-0.25,-1.935) 10(0.25,-1.935) 11(0.75,-1.935) 12(1.25,-1.935) 19(1.25,1.935) 20(0.75,1.935) 21(0.25,1.935) 22(-0.25,1.935) 23(-0.75,1.935) 24(-1.25,1.935)
  rect 2.5x2.5 smd paste-2 mask+0.15: 25(0,0)
  silkscreen extent -2.79,-2 2,2, body extent -2,-2 2,2, height 0.95
R_0402 [mm]
  rect 0.55x0.6 smd: 1(-0.4,0) 2(0.4,0)
  silkscreen extent -0.87,-0.48 0.87,0.48, body extent -0.52,-0.3 0.52,0.3, height 0.34
R_0603 [mm]
  rect 0.6x0.9 smd: 1(-0.75,0) 2(0.75,0)
  silkscreen extent -1.3,-0.7 1.3,0.7, body extent -0.8,-0.41 0.8,0.41, height 0.45
R_0805 [mm] "Resistor Pattern"
  rect 0.7x1.3 smd: 1(-0.95,0) 2(0.95,0)
  silkscreen extent -1.65,-1 1.65,1, body extent -1,-0.6 1,0.6, height 0.5
R_1206 [mm]
  rect 1.15x1.8 smd: 1(-1.5,0) 2(1.5,0)
  silkscreen extent -2.32,-1.15 2.33,1.15, body extent -1.6,-0.8 1.6,0.8, height 1
RJ45-TH_HR915340A [mil] "HR915340A"
  round 60 hole 36 paste+0 mask+1.97: 1(0,0) 2(-50,-100) 3(-100,0) 4(-150,-100) 5(-200,0) 6(-250,-100) 7(-300,0) 8(-350,-100)
  round 66.93 hole 43.31 paste+0 mask+1.97: 9(-439.76,350) 10(-439.76,429.92) 11(89.76,350) 12(89.76,429.92)
  round 90.55 hole 66.93 paste+0 mask+1.97: 13(-485.04,129.92) 14(135.04,129.92)
  Keep-Out Layer board cut-out: -337.01,250 -343.25,277.33 -360.73,299.25 -385.99,311.41 -414.02,311.41 -439.28,299.25 -456.76,277.33 -463,250 -463,250 -456.76,222.67 -439.28,200.75 -414.02,188.58 -385.98,188.58 -360.73,200.75 -343.25,222.67 -337.01,250
  Keep-Out Layer board cut-out: 112.99,250 106.75,277.33 89.27,299.25 64.01,311.41 35.98,311.41 10.72,299.25 -6.76,277.33 -13,250 -13,250 -6.76,222.67 10.72,200.75 35.98,188.58 64.02,188.58 89.27,200.75 106.75,222.67 112.99,250
  silkscreen extent -492,-173 142,679, body extent -493,-174 144,678, height 524
SMD-4P [mm]
  rect 1.5x1.9 smd: 1(0,0) 2(2.54,0) 3(2.54,8.3) 4(0,8.3)
  silkscreen extent -1.03,1.55 3.57,6.75, body extent -1.02,-0.85 3.56,9.15, height 4.25
SO-8 [mm] "SOIC, 8-Leads, Body 4.9x3.9mm, Pitch 1.27mm, IPC Medium Density"
  oval 2.2x0.6 smd: 1(-2.4,1.905) 2(-2.4,0.635) 3(-2.4,-0.635) 4(-2.4,-1.905) 5(2.4,-1.905) 6(2.4,-0.635) 7(2.4,0.635) 8(2.4,1.905)
  silkscreen extent -2.52,-2.5 0.9,2.88, body extent -3.17,-2.51 3.17,2.49, height 1.88
SO-8_M [mm] "SOIC, 8-Leads, Body 4.9x3.9mm, Pitch 1.27mm, IPC Low Density"
  oval 2.5x0.7 smd: 1(-2.45,1.905) 2(-2.45,0.635) 3(-2.45,-0.635) 4(-2.45,-1.905) 5(2.45,-1.905) 6(2.45,-0.635) 7(2.45,0.635) 8(2.45,1.905)
  silkscreen extent -2.57,-2.5 0.8,2.93, body extent -3.17,-2.51 3.17,2.49, height 1.88
SOD80C [mm]
  rect 1.25x2 smd: 1(1.651,0) 2(-1.651,0)
  silkscreen extent -2.54,-1.27 2.54,1.27, body extent -1.85,-0.8 1.85,0.8, height 1.6
SOD-123 [mm] "SOD-123; 2 Leads; Body 2.7 x 1.6 mm, (LxW)"
  rect 1.6x0.8 smd: 1(-1.7,0) 2(1.7,0)
  silkscreen extent -1.95,-1.12 2.24,1.12, body extent -1.87,-0.86 1.98,0.84, height 1.43
SOP64P600X175-20N [mm]
  rect 1.85x0.4 smd mask+0.15: 1(-2.7,2.857) 2(-2.7,2.222) 3(-2.7,1.587) 4(-2.7,0.953) 5(-2.7,0.318) 6(-2.7,-0.318) 7(-2.7,-0.953) 8(-2.7,-1.587) 9(-2.7,-2.222) 10(-2.7,-2.857) 11(2.7,-2.857) 12(2.7,-2.222) 13(2.7,-1.587) 14(2.7,-0.953) 15(2.7,-0.318) 16(2.7,0.318) 17(2.7,0.953) 18(2.7,1.587) 19(2.7,2.222) 20(2.7,2.857)
  silkscreen extent -3.45,-4.25 1.25,4.25, body extent -3,-4.33 3,4.33, height 1.75
SOP254P700X270-4N [mm]
  rect 0.7x1.65 smd: 1(0,0) 2(2.54,0) 3(2.54,6.5) 4(0,6.5)
  silkscreen extent -0.7,-0.82 3.22,5.33, body extent -0.68,-0.25 3.22,6.75, height 2.7
SOT23#1 [mil]
  rect 30x30 smd: 1(0,0) 2(0,75) 3(-90,37.5)
  silkscreen extent -59,-12 -31,87, body extent -94,-21 4,97, height 41
SOT23#2 [mil]
  rect 30x30 smd: 1(0,0) 2(0,-75) 3(90,-37.5)
  silkscreen extent 28,-87 63,12, body extent -4,-97 94,21, height 41
SOT95P280X145-6N [mm]
  rrect25% 1.21x0.59 smd: 1(-1.255,0.95) 2(-1.255,0) 3(-1.255,-0.95) 4(1.255,-0.95) 5(1.255,0) 6(1.255,0.95)
  silkscreen extent -1.4,-1.57 0.81,1.8, body extent -1.4,-1.46 1.4,1.46, height 1.42
"SOT 223" [mm]
  rrect10% 2.2x1.2 smd mask+0: 1(3.1,0) 2(3.1,2.3) 3(3.1,-2.3)
  rrect10% 2.2x3.6 smd mask+0: 4(-3.1,0)
  silkscreen extent -1.8,-3.4 1.8,3.4, body extent -3.47,-3.25 3.47,3.25, height 1.64
SPKR_PKMCS0909E4000-R1 [mm]
  rect 1.3x3.4 smd: 1(-4.35,0) 2(4.35,0)
  silkscreen extent -5.1,-4.5 4.5,4.5, body extent -4.5,-4.5 4.5,4.5, height 1.9
STM-UFQFPN48_M [mm] "QFN, 48-Leads, Body 7.1x7.1mm, Pitch 0.5mm, Thermal Pad 5.6x5.6mm, IPC Low Density"
  oval 1x0.25 smd: 1(-3.5,2.75) 2(-3.5,2.25) 3(-3.5,1.75) 4(-3.5,1.25) 5(-3.5,0.75) 6(-3.5,0.25) 7(-3.5,-0.25) 8(-3.5,-0.75) 9(-3.5,-1.25) 10(-3.5,-1.75) 11(-3.5,-2.25) 12(-3.5,-2.75) 25(3.5,-2.75) 26(3.5,-2.25) 27(3.5,-1.75) 28(3.5,-1.25) 29(3.5,-0.75) 30(3.5,-0.25) 31(3.5,0.25) 32(3.5,0.75) 33(3.5,1.25) 34(3.5,1.75) 35(3.5,2.25) 36(3.5,2.75)
  oval 0.25x1 smd: 13(-2.75,-3.5) 14(-2.25,-3.5) 15(-1.75,-3.5) 16(-1.25,-3.5) 17(-0.75,-3.5) 18(-0.25,-3.5) 19(0.25,-3.5) 20(0.75,-3.5) 21(1.25,-3.5) 22(1.75,-3.5) 23(2.25,-3.5) 24(2.75,-3.5) 37(2.75,3.5) 38(2.25,3.5) 39(1.75,3.5) 40(1.25,3.5) 41(0.75,3.5) 42(0.25,3.5) 43(-0.25,3.5) 44(-0.75,3.5) 45(-1.25,3.5) 46(-1.75,3.5) 47(-2.25,3.5) 48(-2.75,3.5)
  rect 5.6x5.6 smd: 49(0,0)
  silkscreen extent -4.47,-3.7 3.7,3.7, body extent -3.51,-3.52 3.51,3.5, height 0.78
TQFP144_M [mm] "Thin QFP, 144-Leads, Body 20x20mm, Pitch 0.5mm, IPC Low Density"
  oval 2.1x0.3 smd: 1(-10.6,8.75) 2(-10.6,8.25) 3(-10.6,7.75) 4(-10.6,7.25) 5(-10.6,6.75) 6(-10.6,6.25) 7(-10.6,5.75) 8(-10.6,5.25) 9(-10.6,4.75) 10(-10.6,4.25) 11(-10.6,3.75) 12(-10.6,3.25) 13(-10.6,2.75) 14(-10.6,2.25) 15(-10.6,1.75) 16(-10.6,1.25) 17(-10.6,0.75) 18(-10.6,0.25) 19(-10.6,-0.25) 20(-10.6,-0.75) 21(-10.6,-1.25) 22(-10.6,-1.75) 23(-10.6,-2.25) 24(-10.6,-2.75) 25(-10.6,-3.25) 26(-10.6,-3.75) 27(-10.6,-4.25) 28(-10.6,-4.75) 29(-10.6,-5.25) 30(-10.6,-5.75) 31(-10.6,-6.25) 32(-10.6,-6.75) 33(-10.6,-7.25) 34(-10.6,-7.75) 35(-10.6,-8.25) 36(-10.6,-8.75) 73(10.6,-8.75) 74(10.6,-8.25) 75(10.6,-7.75) 76(10.6,-7.25) 77(10.6,-6.75) 78(10.6,-6.25) 79(10.6,-5.75) 80(10.6,-5.25) 81(10.6,-4.75) 82(10.6,-4.25) 83(10.6,-3.75) 84(10.6,-3.25) 85(10.6,-2.75) 86(10.6,-2.25) 87(10.6,-1.75) 88(10.6,-1.25) 89(10.6,-0.75) 90(10.6,-0.25) 91(10.6,0.25) 92(10.6,0.75) 93(10.6,1.25) 94(10.6,1.75) 95(10.6,2.25) 96(10.6,2.75) 97(10.6,3.25) 98(10.6,3.75) 99(10.6,4.25) 100(10.6,4.75) 101(10.6,5.25) 102(10.6,5.75) 103(10.6,6.25) 104(10.6,6.75) 105(10.6,7.25) 106(10.6,7.75) 107(10.6,8.25) 108(10.6,8.75)
  oval 0.3x2.1 smd: 37(-8.75,-10.6) 38(-8.25,-10.6) 39(-7.75,-10.6) 40(-7.25,-10.6) 41(-6.75,-10.6) 42(-6.25,-10.6) 43(-5.75,-10.6) 44(-5.25,-10.6) 45(-4.75,-10.6) 46(-4.25,-10.6) 47(-3.75,-10.6) 48(-3.25,-10.6) 49(-2.75,-10.6) 50(-2.25,-10.6) 51(-1.75,-10.6) 52(-1.25,-10.6) 53(-0.75,-10.6) 54(-0.25,-10.6) 55(0.25,-10.6) 56(0.75,-10.6) 57(1.25,-10.6) 58(1.75,-10.6) 59(2.25,-10.6) 60(2.75,-10.6) 61(3.25,-10.6) 62(3.75,-10.6) 63(4.25,-10.6) 64(4.75,-10.6) 65(5.25,-10.6) 66(5.75,-10.6) 67(6.25,-10.6) 68(6.75,-10.6) 69(7.25,-10.6) 70(7.75,-10.6) 71(8.25,-10.6) 72(8.75,-10.6) 109(8.75,10.6) 110(8.25,10.6) 111(7.75,10.6) 112(7.25,10.6) 113(6.75,10.6) 114(6.25,10.6) 115(5.75,10.6) 116(5.25,10.6) 117(4.75,10.6) 118(4.25,10.6) 119(3.75,10.6) 120(3.25,10.6) 121(2.75,10.6) 122(2.25,10.6) 123(1.75,10.6) 124(1.25,10.6) 125(0.75,10.6) 126(0.25,10.6) 127(-0.25,10.6) 128(-0.75,10.6) 129(-1.25,10.6) 130(-1.75,10.6) 131(-2.25,10.6) 132(-2.75,10.6) 133(-3.25,10.6) 134(-3.75,10.6) 135(-4.25,10.6) 136(-4.75,10.6) 137(-5.25,10.6) 138(-5.75,10.6) 139(-6.25,10.6) 140(-6.75,10.6) 141(-7.25,10.6) 142(-7.75,10.6) 143(-8.25,10.6) 144(-8.75,10.6)
  silkscreen extent -10.86,-9.15 9.15,10.42, body extent -11.1,-11.1 11.1,11.1, height 1.8
TSSOP16_STM [mm]
  rect 1.162x0.305 smd paste+0 mask+0: 1(-2.871,2.275) 2(-2.871,1.625) 3(-2.871,0.975) 4(-2.871,0.325) 5(-2.871,-0.325) 6(-2.871,-0.975) 7(-2.871,-1.625) 8(-2.871,-2.275) 9(2.871,-2.275) 10(2.871,-1.625) 11(2.871,-0.975) 12(2.871,-0.325) 13(2.871,0.325) 14(2.871,0.975) 15(2.871,1.625) 16(2.871,2.275)
  silkscreen extent -3.43,-2.68 2.07,3.05, body extent -3.3,-2.55 3.3,2.55, height 1.2
"W-PDFN-8 (MLP8) – 8mm ? 6mm  Se" [mm]
  rect 0.4x0.9 smd: 1(-1.955,-3.872) 2(-0.685,-3.872) 3(0.585,-3.872) 4(1.855,-3.872) 5(1.855,3.898) 6(0.585,3.898) 7(-0.685,3.898) 8(-1.955,3.898)
  rect 4.3x3.4 smd paste-1.7: 9(-0.05,0.013)
  silkscreen extent -3.3,-4.64 3.15,4.21, body extent -3.1,-4.04 3,4.06, height 0.75
X5032 [mm]
  rect 1.7x2.4 smd: 1(-1.85,0) 2(1.85,0)
  silkscreen extent -2.2,-1.6 2.2,1.6, body extent -2.53,-1.6 2.53,1.6, height 1.45
XTAL_NX3215SA-32.768K-STD-MUA-8 [mm]
  rect 1x1.8 smd: 1(-1.25,0) 2(1.25,0)
  silkscreen extent -0.43,-0.75 0.43,0.75, body extent -1.6,-0.75 1.6,0.75, height 0.9

## Part data
BAT1: "Battery", JLCPCB Part=C6078169, Part=2998TR
BUZ1: library part BUZZER, "Piezoelectric Sounders", JLCPCB Part=C910763, Alternative Part=PKMCS0909E4000-R1, Part=L-KLS3-SMT-09X1.8
C1 C2 C5 C6: library part CAP_SMD, "Capacitor", JLCPCB Part=C326970, Part=CC0603DRNPO9BN8R0
C3 C4 C11 C12 C13 C14 C15 C16 C17 C18 C19 C20 C22 C23 C24 C25 C26 C30 C40 C54 C56: library part C0603, "Capacitor", JLCPCB Part=C14663, Part=CC0603KPX7R9BB104
C7 C21 C27: library part CAP_SMD, "Capacitor", JLCPCB Part=C14663, Part=CC0603KPX7R9BB104
C8 C9: library part CAP_SMD, "Capacitor", JLCPCB Part=C106853, Part=CC0603KRX5R7BB225
C28 C29 C31 C32 C33: library part C0805, "Capacitor", JLCPCB Part=C107146, Alternative Part=CL21B222KBANNNC, Part=CC0805KRX7R9BB222
C34: library part C1206, "Capacitor", JLCPCB Part=C100122, Alternative Part=CL31A106KBHNNNE, Part=CC1206KKX5R9BB106
C35: library part C1206, "Capacitor", JLCPCB Part=C2178233, Alternative Part=CL31A226KAHNNNE, Part=CC1206KKX5R8BB226
C36 C41 C42 C45 C46 C55: library part C0402, "Capacitor", JLCPCB Part=C60474, Alternative Part=CC0402KRX5R7BB104, Part=CC0402KRX7R7BB104
C37 C38: library part C0805, "Capacitor", JLCPCB Part=C89832, Part=CC0805KKX5R6BB106
C43 C44: library part C0402, "Capacitor", JLCPCB Part=C327227, Part=CC0402DRNPO9BN8R0
C47 C59 C60: library part C0402, "Capacitor", JLCPCB Part=C60133, Part=CC0402KRX7R9BB103
C48 C53: library part CAP_SMD, "Capacitor", JLCPCB Part=C113797, Part=CC0603JRNPO9BN300
C49: library part CAP_SMD, "Capacitor", JLCPCB Part=C106222, Part=CC0603KRX7R9BB223
C50: library part C0402, "Capacitor", JLCPCB Part=C106207, Part=CC0402KRX7R9BB471
C51 C52: library part CAP_SMD, "Capacitor", JLCPCB Part=C559769, Part=CC0603KRX7R9BB105
C61 C62: library part C0603, "Capacitor", JLCPCB Part=C559769, Part=CC0603KRX7R9BB105
C63: library part C1206, "Capacitor", JLCPCB Part=C107191, Alternative Part=CL31B102KIFNNNE, Part=CC1206KKX7RCBB102
D1 D7 D11: library part LED_SMT_0603, "LED", JLCPCB Part=C2994781, Alternative Part=KP-1608CGCK, Color=Green, Part=FYLS-0603PGC
D2 D12: library part LED_SMT_0603, "LED", JLCPCB Part=C72038, Alternative Part=KP-1608CGCK, Color=Yellow, Part=FYLS-0603PGC
D3 D5 D13: library part LED_SMT_0603, "LED", JLCPCB Part=C2986060, Alternative Part=KP-1608CGCK, Color=Red, Part=FYLS-0603PGC
D4: library part DZ_SOD80, "Diode", JLCPCB Part=C545361, Part=BZV55C10
D6: library part D_SOD123, "Diode", JLCPCB Part=C52754468, Part=SM5819PL-TP
D8: "Diode", JLCPCB Part=C408389, Part=BAT54
D9: library part ESD_CAN, "ESD", JLCPCB Part=C5158050, Part=ESDCAN24-2BLY
D10: library part ESD, "ESD", JLCPCB Part=C5449363, Part=SM712-02HTG
D14: library part TVS_SOT23, "Diode", JLCPCB Part=C95343, JLCPCBPart=C95343, Part=ESDA25L
L2: library part L_0603, "Inductor", JLCPCB Part=C113093, Part=LQM18FN1R0M00D
Q1: "Transistor", JLCPCB Part=C181140, Part=BC847B
Q2: library part NPN, "NPN Bipolar Transistor", JLCPCB Part=C81408, Code - JEDEC=TO-226-AA, Part=MMBT9013, Published=8-Jun-2000, Publisher="Altium Limited", Revision="July-2002: Re-released for DXP Platform."
Q6: library part P-ch_SOT23, "P-Channel MOSFET", JLCPCB Part=C2681220, Part=SI2309A
R1 R2 R5 R6 R31 R53 R75 R78: library part RES_SMD, "Resistor", JLCPCB Part=C99198, Part=RC0603JR-0710KL
R3: library part RES_SMD, "Resistor", JLCPCB Part=C22548, Part=RC0603FR-071KL
R4: library part RES_SMD, "Resistor", JLCPCB Part=C108078, Part=RC0603FR-073K3L
R7: library part RES_SMD, "Resistor", JLCPCB Part=C100048, Part=RC0603JR-07100KL
R8 R10 R12 R14 R16: library part R0805, "Resistor", JLCPCB Part=C114535, Alternative Part=CR-05JL7-6K2, Part=RC0805JR-076K2L
R9 R11 R13 R15 R17: library part R0805, "Resistor", JLCPCB Part=C114236, Alternative Part=CR-05JL7-2K4, Part=RC0805JR-072K4L
R18 R19 R20 R21 R22 R23 R24 R25 R26 R27 R32 R33 R61 R62 R63 R69 R70: library part R0603, "Resistor", JLCPCB Part=C114617, Part=RC0603FR-07300RL
R28 R64 R65 R66 R67: library part R0402, "Resistor", JLCPCB Part=C60489, Part=RC0402JR-0710KL
R29 R37: library part R0402, "Resistor", JLCPCB Part=C106233, Part=RC0402JR-07100RL
R30: library part R0402, "Resistor", JLCPCB Part=C137879, Part=RC0402JR-0736KL
R34 R35 R38: library part R0402, "Resistor", JLCPCB Part=C105870, Part=RC0402JR-074K7L
R36: library part R0402, "Resistor", JLCPCB Part=C114451, Part=RC0402JR-071K5L
R39 R40: library part R0402, "Resistor", JLCPCB Part=C106234, Part=RC0402JR-07100KL
R41 R42 R43 R73 R74: library part R0402, "Resistor", JLCPCB Part=C93929, Part=RC0402JR-0722RL
R44 R45: library part RES_SMD, "Resistor", JLCPCB Part=C14677, Part=RC0603JR-075K1L
R46 R47 R48 R49: library part RES_SMD, "Resistor", JLCPCB Part=C114625, Part=RC0603FR-0749R9L
R50 R57 R58: library part RES_SMD, "Resistor", JLCPCB Part=C109318, Part=RC0603FR-0710RL
R51 R71 R76 R77: library part RES_SMD, "Resistor", JLCPCB Part=C99782, Part=RC0603FR-074K7L
R52: library part RES_SMD, "Resistor", JLCPCB Part=C108661, Part=RC0603FR-0733RL
R54 R55 R56: library part RES_SMD, "Resistor", JLCPCB Part=C137639, Part=RC0402JR-0727RL
R59 R72: library part RES_SMD, "Resistor", JLCPCB Part=C105881, Part=RC0603FR-07330RL
R60: library part RES_SMD, "Resistor", JLCPCB Part=C123417, Part=RC0603FR-0712K1L
R68: library part R0402, "Resistor", JLCPCB Part=C138017, Part=RC0402FR-072K7L
R79: library part R1206, "Resistor", JLCPCB Part=C108083, Part=RC1206FR-071ML
"RLINK SWD1" SWD1: "Header, 5-Pin", LatestRevisionDate=17-Jul-2002, LatestRevisionNote="Re-released for DXP Platform.", Part=DS1021-1x5SF11-B, Publisher="Altium Limited"
U1: library part STM32F76XZXT, "Microcontroller", JLCPCB Part=C2971616, C="Copyright (C) 2016 Accelerated Designs. All rights reserved", Copyright="Copyright (C) 2016 Accelerated Designs. All rights reserved", Manufacturer_Part_Number=STM32F76XZXT, Part=STM32F765ZGT, Vendor=STMicroelectronics
U2: library part "LDO 3.3v", JLCPCB Part=C411821, Part=LM1117GS-3.3
U3: "CAN_transiever", JLCPCB Part=C30530, Part=SN65HVD232DR
U4: JLCPCB Part=C2671164, Mfr_Name=STMicroelectronics, Copyright="Copyright (C) 2022 Ultra Librarian. All rights reserved.", Part=ST232CTR, RefDes=RefDes, Type=DEV
U5: "RS485 Half Duplex Convertor", JLCPCB Part=C2829048, Part=SN75176BDR
U6: "Isolated Octal Industrial Digital Input", JLCPCB Part=C5210911, Part=CA-IS3988P
U7 U8 U10 U12 U15: "Solid State Relay 60V 3A", JLCPCB Part=C7435131, Part=GAQY252G3EH
U9 U11 U13 U14 U16: library part KAQY212S, "Solid State Relay 60V 250mA", JLCPCB Part=C22385176, Part=GAQY221R2S
U17: library part K78xx-500R3, "Non-isolated dc-dc", JLCPCB Part=C19188491, Part=K7805-500R3
U19: library part MT25QL********W9-0SIT, "Flash Memory", JLCPCB Part=C2456297, Part=W25Q128JVEIQ
U20: "STM32 ARM-based 32-bit MCU Performance Line with 128 kB Flash, 20 kB Internal RAM, -40 to +85°C Temperature, 48-Pin VFQFPN, Tray", JLCPCB Part=C55506, ComponentLink1Description="Manufacturer URL", ComponentLink1URL=http://www.st.com/, ComponentLink2Description="STM32F103 Datasheet", ComponentLink2URL=http://www.st.com/internet/com/TECHNICAL_RESOURCES/TECHNICAL_LITERATURE/DATASHEET/CD00161566.pdf, ComponentLink3Description="STM32 Family Web Page", ComponentLink3URL=www.st.com/stm32, DatasheetVersion="rev13.0, Apr-2011", PackageDescription="48-Pin Quad Flat No-Lead, 7 x 7 x 0.9 mm Body, 0.5 mm Pitch, Exposed Pad", PackageReference=VFQFPN48, PackageVersion=2011, Part=STM32F103CBU6
U21: "17V Clamp 5A (8/20Âµs) Ipp Tvs Diode Surface Mount SOT-23-6", JLCPCB Part=C2827654, Package="SOT-23-6 STMicroelectronics", Availability="In Stock", Check_prices=https://www.snapeda.com/parts/USBLC6-2SC6/STMicroelectronics/view-part/?ref=eda, MF=STMicroelectronics, MP=USBLC6-2SC6, Part=USBLC6-2SC6, Price=None, Purchase-URL=https://pricing.snapeda.com/search/part/USBLC6-2SC6/?ref=eda, SnapEDA_Link=https://www.snapeda.com/parts/USBLC6-2SC6/STMicroelectronics/view-part/?ref=snap
U23: "USB 2.0 HIGH SPEED 4-PORT HUB CONTROLLER", JLCPCB Part=C6776948, Manufacturer_Name="Terminus Technology", Datasheet Link=https://datasheet.lcsc.com/lcsc/2306141021_Terminus-Tech-FE1-1S-BQFN24B_C6776948.pdf, Height=0.8mm, Part=FE1.1S-BQFN24B
U24: "256-Kbit I2C-compatible Serial EEPROM", JLCPCB Part=C6482, Part=AT24C256C
U26: library part LAN8720, "Phy Eth 2/2 Transceiver Full RMII 24-QFN-EP _4x4_", JLCPCB Part=C45223, Package="QFN-24 Microchip", Availability=Unavailable, MF=Microchip, MP=LAN8720A-CP, Part=LAN8720A-CP-TR, Price=None, SnapEDA_Link=https://www.snapeda.com/parts/LAN8720A-CP/Microchip/view-part/237160/?ref=snap
X1: library part 15EDGRHCM-THR-3.5, "THR-3.5-12P", JLCPCB Part=C2908417, Part=1787056
X2: library part "DMC 1,5/12-G1F-3,5-LRP20THRR72 / 1706067", "THR-3.5-24P", JLCPCB Part=1787111, Part=1787111
X3: library part MOLEX_216989-0001, "USB Connector USB TYPE C UPRIGHT STRAIGHT TAB 14 PIN", JLCPCB Part=C5780396, Part=KUSBX-SL-CS1N14-B
X4: library part HR915340A, "DIP RJ45 Connector;", JLCPCB Part=C2760325, Package=None, Availability=Unavailable, MP=HR915340A, Part=HR915340A, Price=None
Y1 Y3: "Crystal Oscillator", JLCPCB Part=C889706, Part=NX3225GD-8MHZ-STD-CRA-3
Y2: library part NX3215SA-32.768K, "Crystal Oscillator", JLCPCB Part=C156244, Part=NX3215SA-32.768K-STD-MUA-14
Y4: "Crystal Oscillator", JLCPCB Part=C112573, Manufacturer_Name="Yangxing Tech", Datasheet Link=https://datasheet.lcsc.com/szlcsc/Yangxing-Tech-X503212MSB2GI_C112573.pdf, Geometry.Height=1.35mm, Manufacturer_Part_Number=X503212MSB2GI, Part=X503212MSB2GI
Y5: library part X503212MSB2GI, "Crystal Oscillator", JLCPCB Part=C112569, Manufacturer_Name="Yangxing Tech", Datasheet Link=https://datasheet.lcsc.com/szlcsc/Yangxing-Tech-X503212MSB2GI_C112573.pdf, Geometry.Height=1.35mm, Manufacturer_Part_Number=X503225MSB2GI, Part=X503225MSB2GI

## Via types
v1: diameter 0.7, hole 0.3, Top Layer to Bottom Layer, tented both sides, 311 vias

## Nets (pads, with @x,y where several pads share a name; then routed paths per layer and width w, separated by ;. In a path a pad name is that pad's centre, name@x,y a point inside that pad or via, vN(x,y) a via of type N, cw(c..) or ccw(c..) an arc to the next point about the centre after c; other vN are vias at no path point)
BOOT0: C3.2 R2.2 U1.138 | length 4
  Top Layer w0.2: R2.2@40.05,-6.8 R2.2@40.15,-6.9
  Top Layer w0.254: U1.138@40.15,-10.8 R2.2@40.15,-6.9
BUZZER: R4.1 U1.4 | length 39.7
  Top Layer w0.254: U1.4@35.3,-14.15 36.496,-14.15 v1(37.35,-15.004) ; R4.1@54.575,-43.7 54.725,-43.7 54.898,-43.527 54.898,-40.723 55.1,-40.521 v1(55.1,-40.4)
  Bottom Layer w0.254: v1(37.35,-15.004) 38.904,-15.004 54.477,-30.577 54.477,-39.777 v1(55.1,-40.4)
CAN_N: D9.2 U3.6 X1.2 X1.11 | length 13.5
  Top Layer w0.2: U3.6@81.15,-19.06 82.082,-19.06 82.417,-18.725 83.064,-18.725 ; D9.2@83.064,-19.403 83.064,-18.725 ; X1.11@87.625,-20.1 87.625,-18.6 ; X1.2@90.125,-20.1 90.125,-18.775 89.95,-18.6 87.625,-18.6 ; 83.064,-18.725 83.7,-18.725 84.725,-17.7 85.825,-17.7 86.725,-18.6 87.625,-18.6
CAN_P: D9.1 U3.7 X1.1 X1.12 | length 13.2
  Top Layer w0.2: U3.7@81.15,-17.79 82.082,-17.79 82.417,-18.125 83.064,-18.125 ; D9.1@83.064,-17.498 83.064,-18.125 ; X1.12@87.625,-16.6 87.65,-16.625 87.65,-18 ; X1.1@90.125,-16.6 90.125,-17.825 89.95,-18 87.65,-18 ; 83.064,-18.125 83.451,-18.125 84.476,-17.1 86.074,-17.1 86.974,-18 87.65,-18
CONFIG_PIN: R78.1 U1.125 | length 2.5
  Top Layer w0.254: U1.125@46.65,-10.8 46.65,-8.75 46.85,-8.55 R78.1@46.85,-8.4
CTS1: U4.8
DI0_IN: C28.2 R8.2 R9.2 U6.7 | length 12.6
  Top Layer w0.254: R8.2@24.065,-47.528 C28.2@26.065,-47.528 R9.2@28.065,-47.528 28.365,-47.528 30.2,-45.693 30.2,-41.7 30.675,-41.225 31.627,-41.225 U6.7@31.7,-41.152
DI1_IN: C29.2 R10.2 R11.2 U6.4 | length 11.5
  Top Layer w0.254: R10.2@24.065,-44.228 C29.2@26.065,-44.228 R11.2@28.065,-44.228 28.365,-44.228 29.255,-43.338 29.255,-40.295 30.327,-39.223 31.676,-39.223 U6.4@31.7,-39.247
DI2_IN: C31.2 R12.2 R13.2 U6.3 | length 9
  Top Layer w0.254: R12.2@24.065,-40.928 C31.2@26.065,-40.928 R13.2@28.065,-40.928 28.365,-40.928 28.801,-40.492 28.801,-39.849 30.038,-38.612 U6.3@31.7,-38.612
DI3_IN: C32.2 R14.2 R15.2 U6.2 | length 7.8
  Top Layer w0.254: R14.2@24.065,-37.628 C32.2@26.065,-37.628 R15.2@28.065,-37.628 30.103,-37.628 30.452,-37.977 U6.2@31.7,-37.977
DI4_IN: C33.2 R16.2 R17.2 U6.1 | length 9.1
  Top Layer w0.254: R16.2@24.065,-34.328 C33.2@26.065,-34.328 R17.2@28.065,-34.328 28.365,-34.328 29.625,-35.588 30.962,-36.925 30.962,-37.269 31.035,-37.342 U6.1@31.7,-37.342